# EAGLE board Tractive System Board Rev2 (EAGLE 9.6.2)
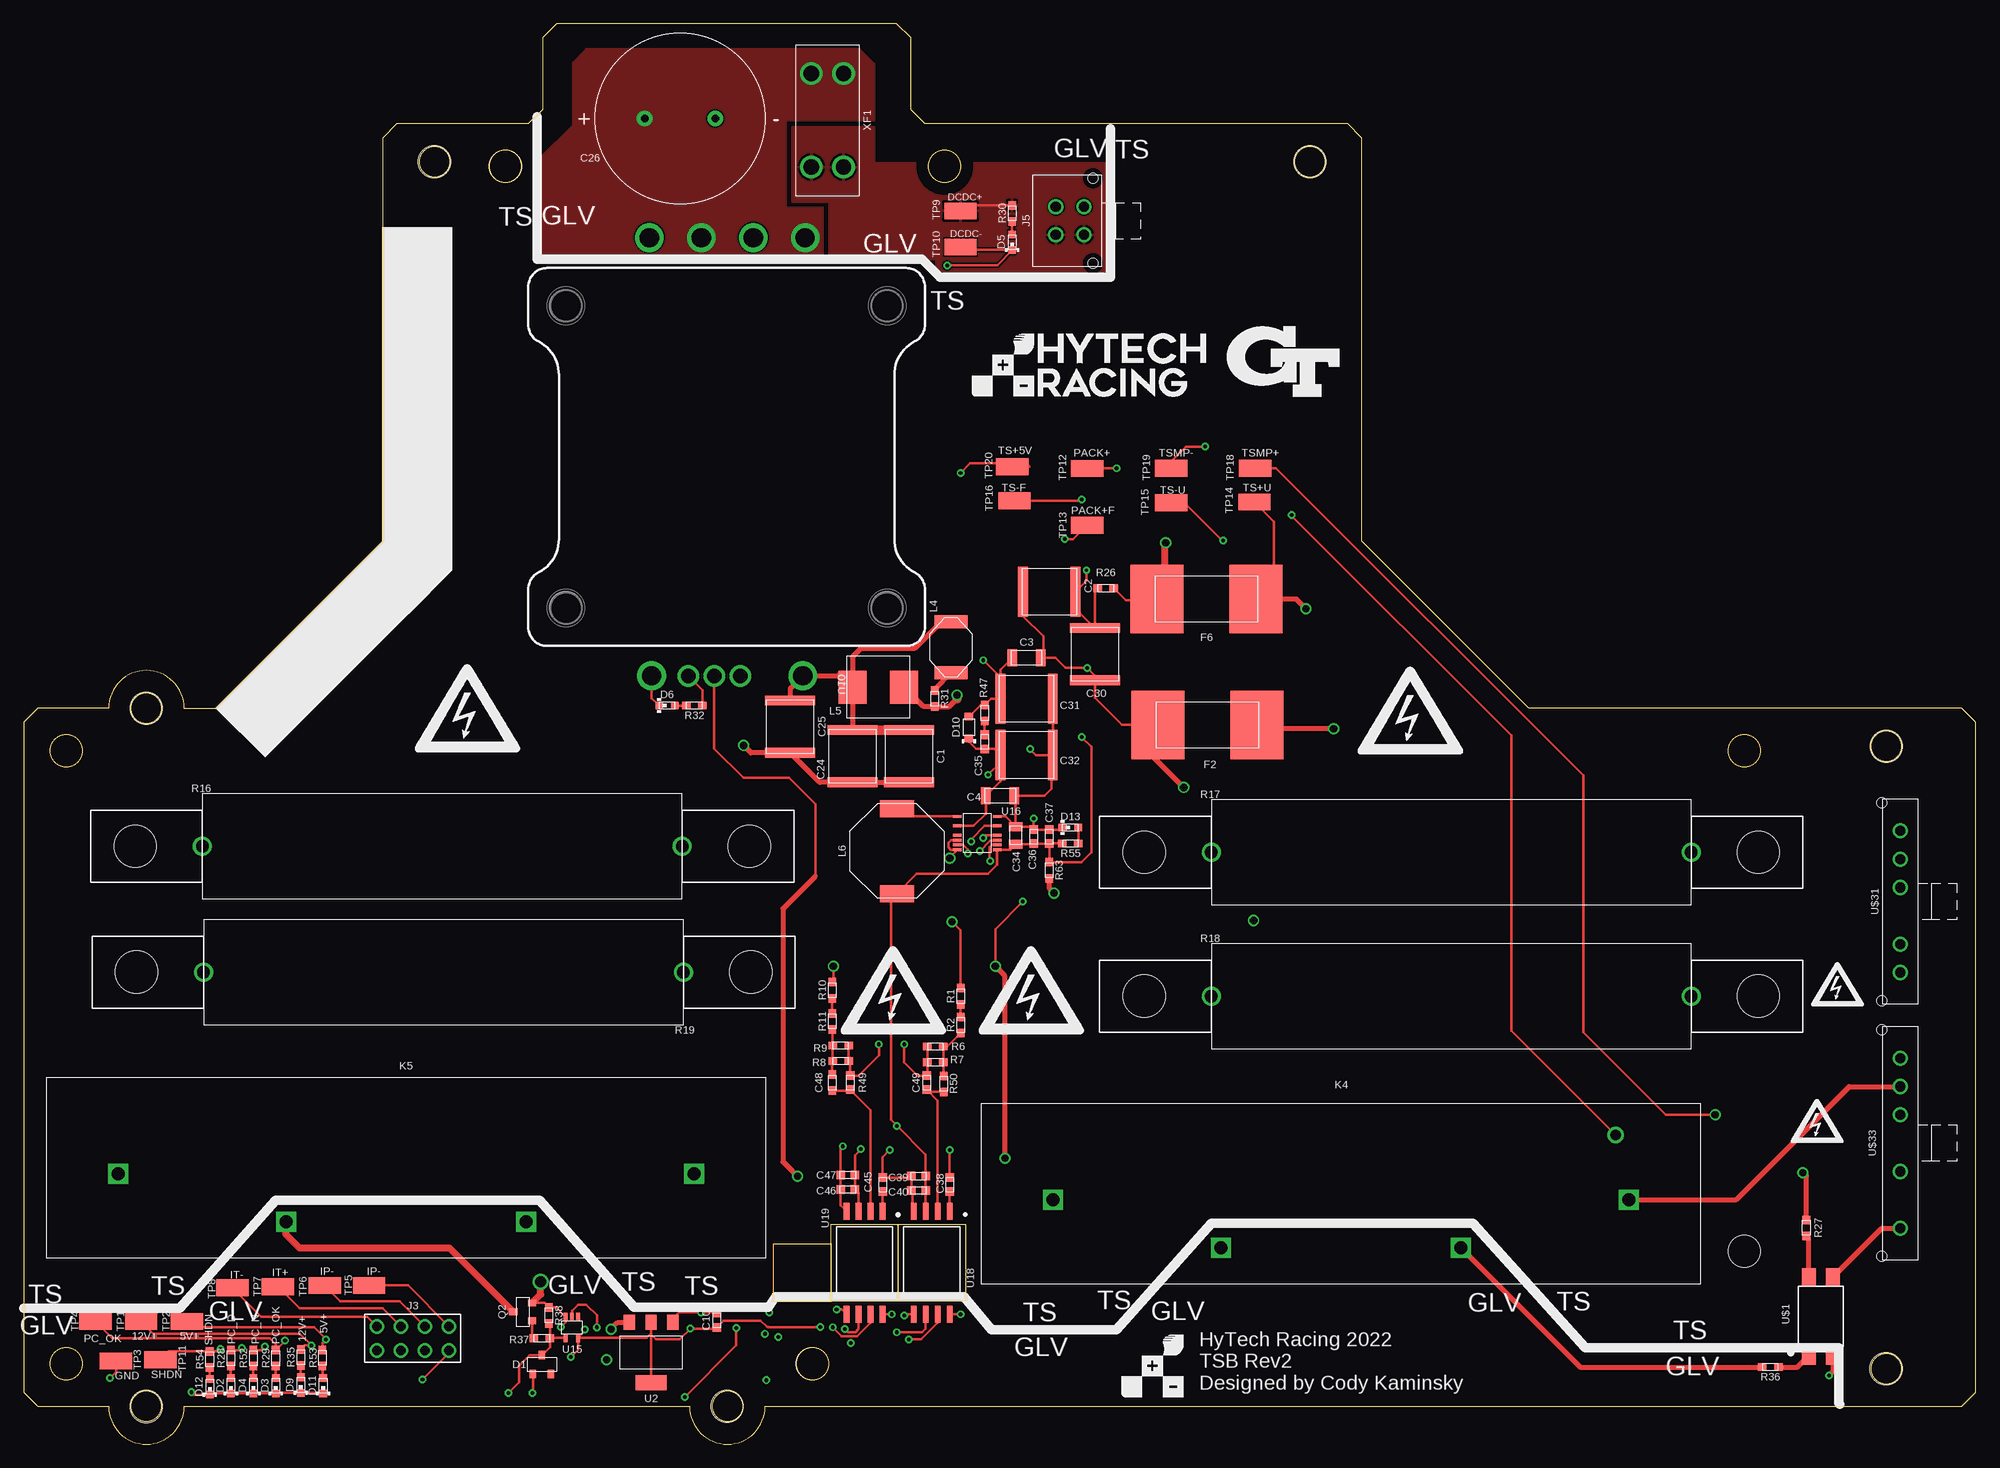
[diagram p0: board, top side]
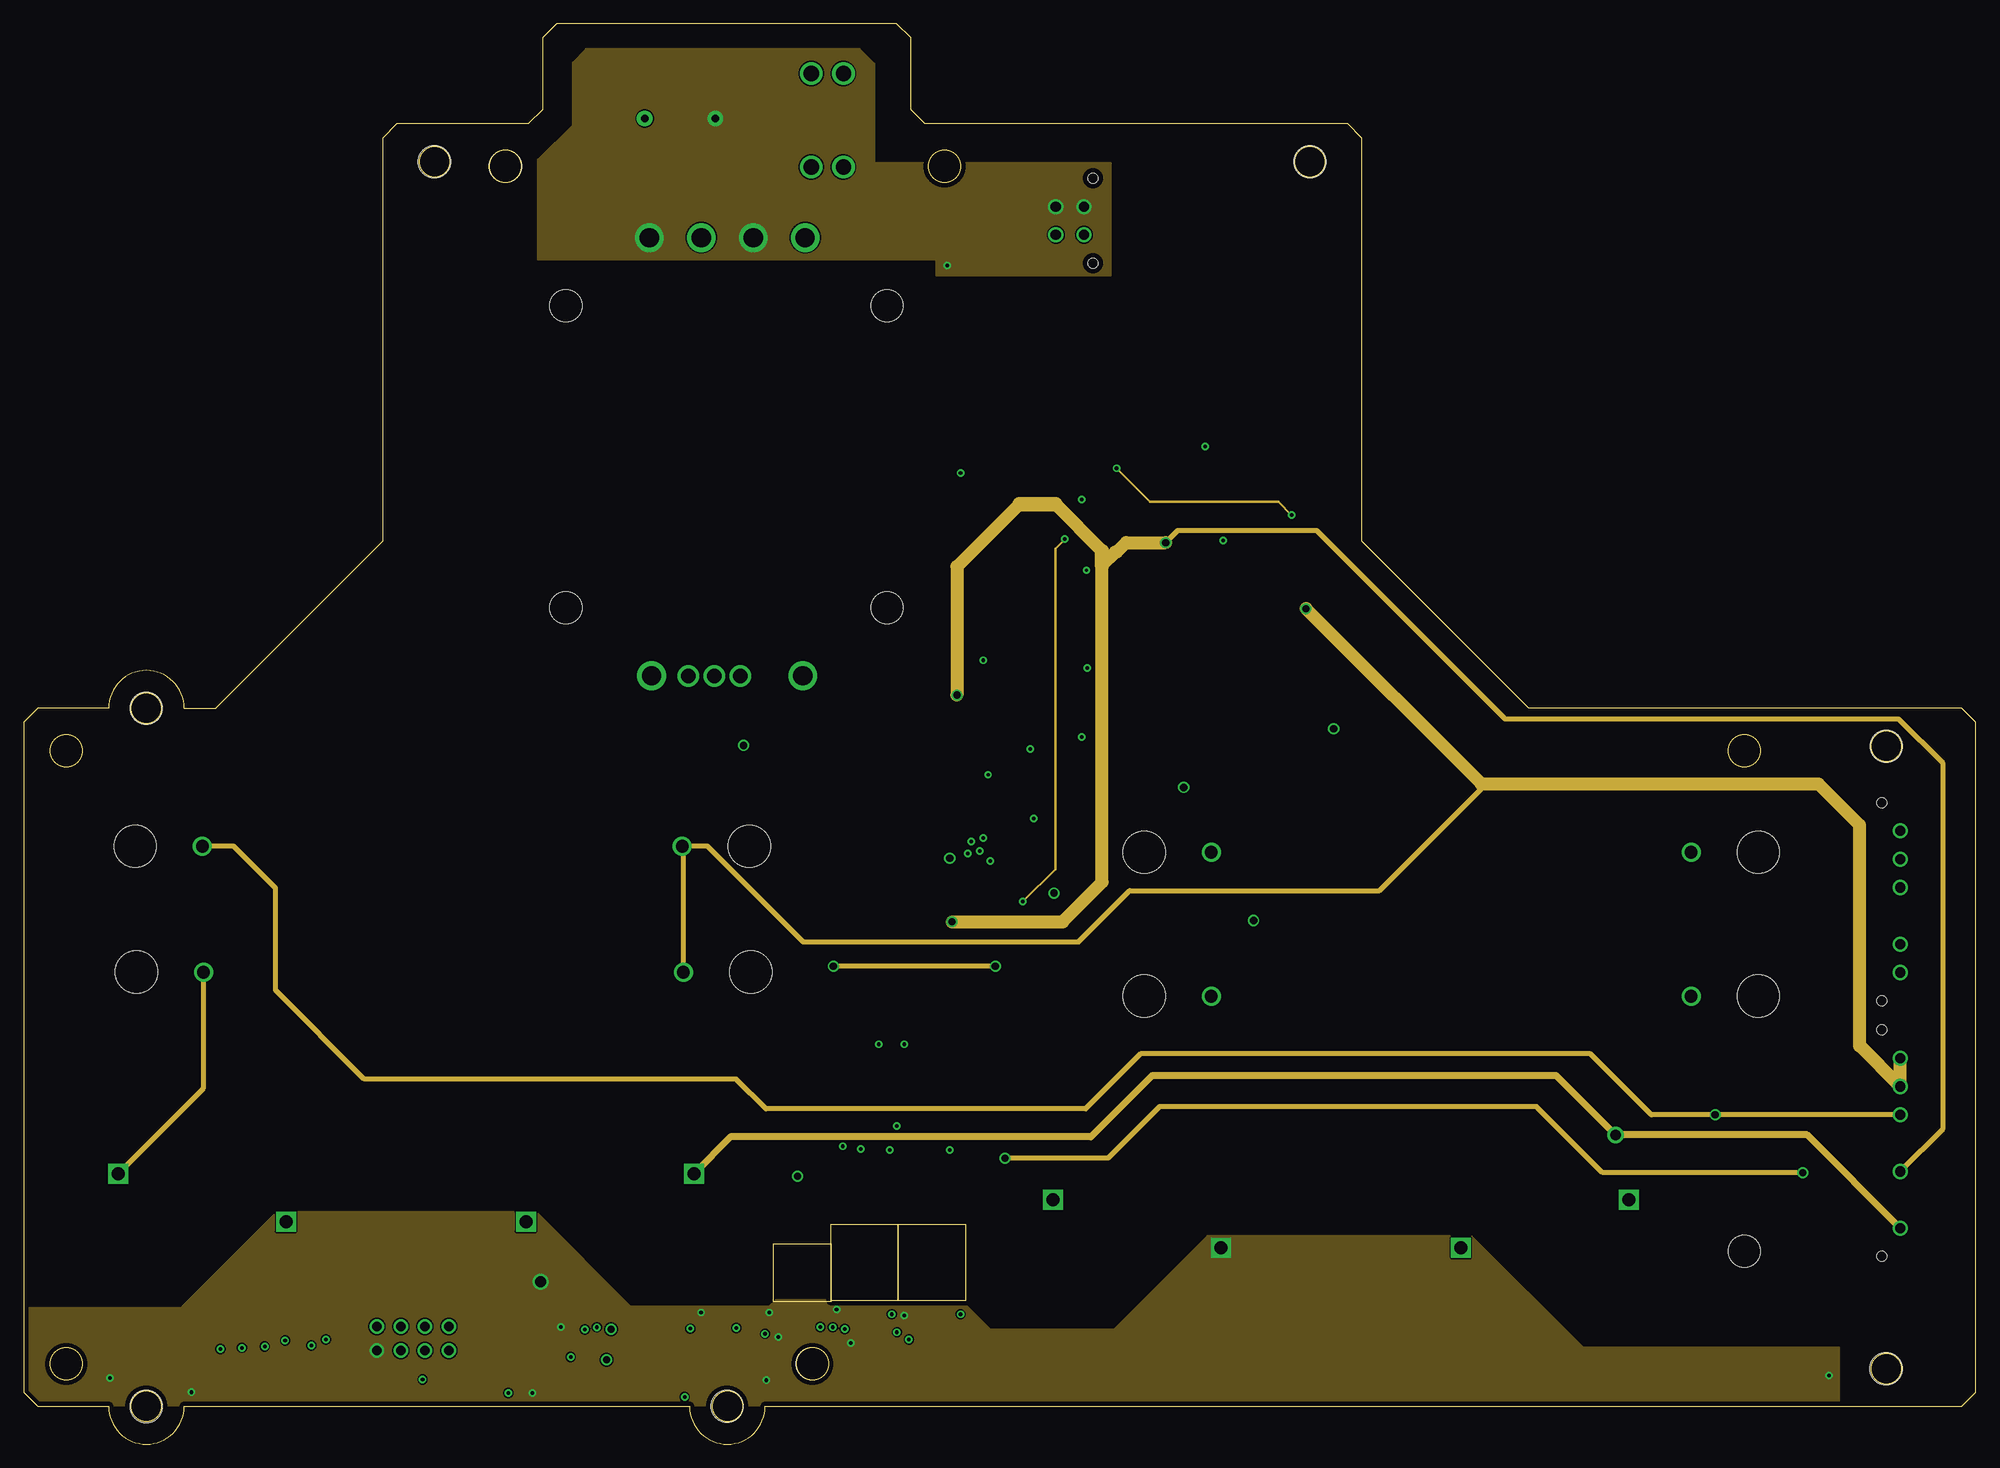
[diagram p1: board, inner layer Route2]
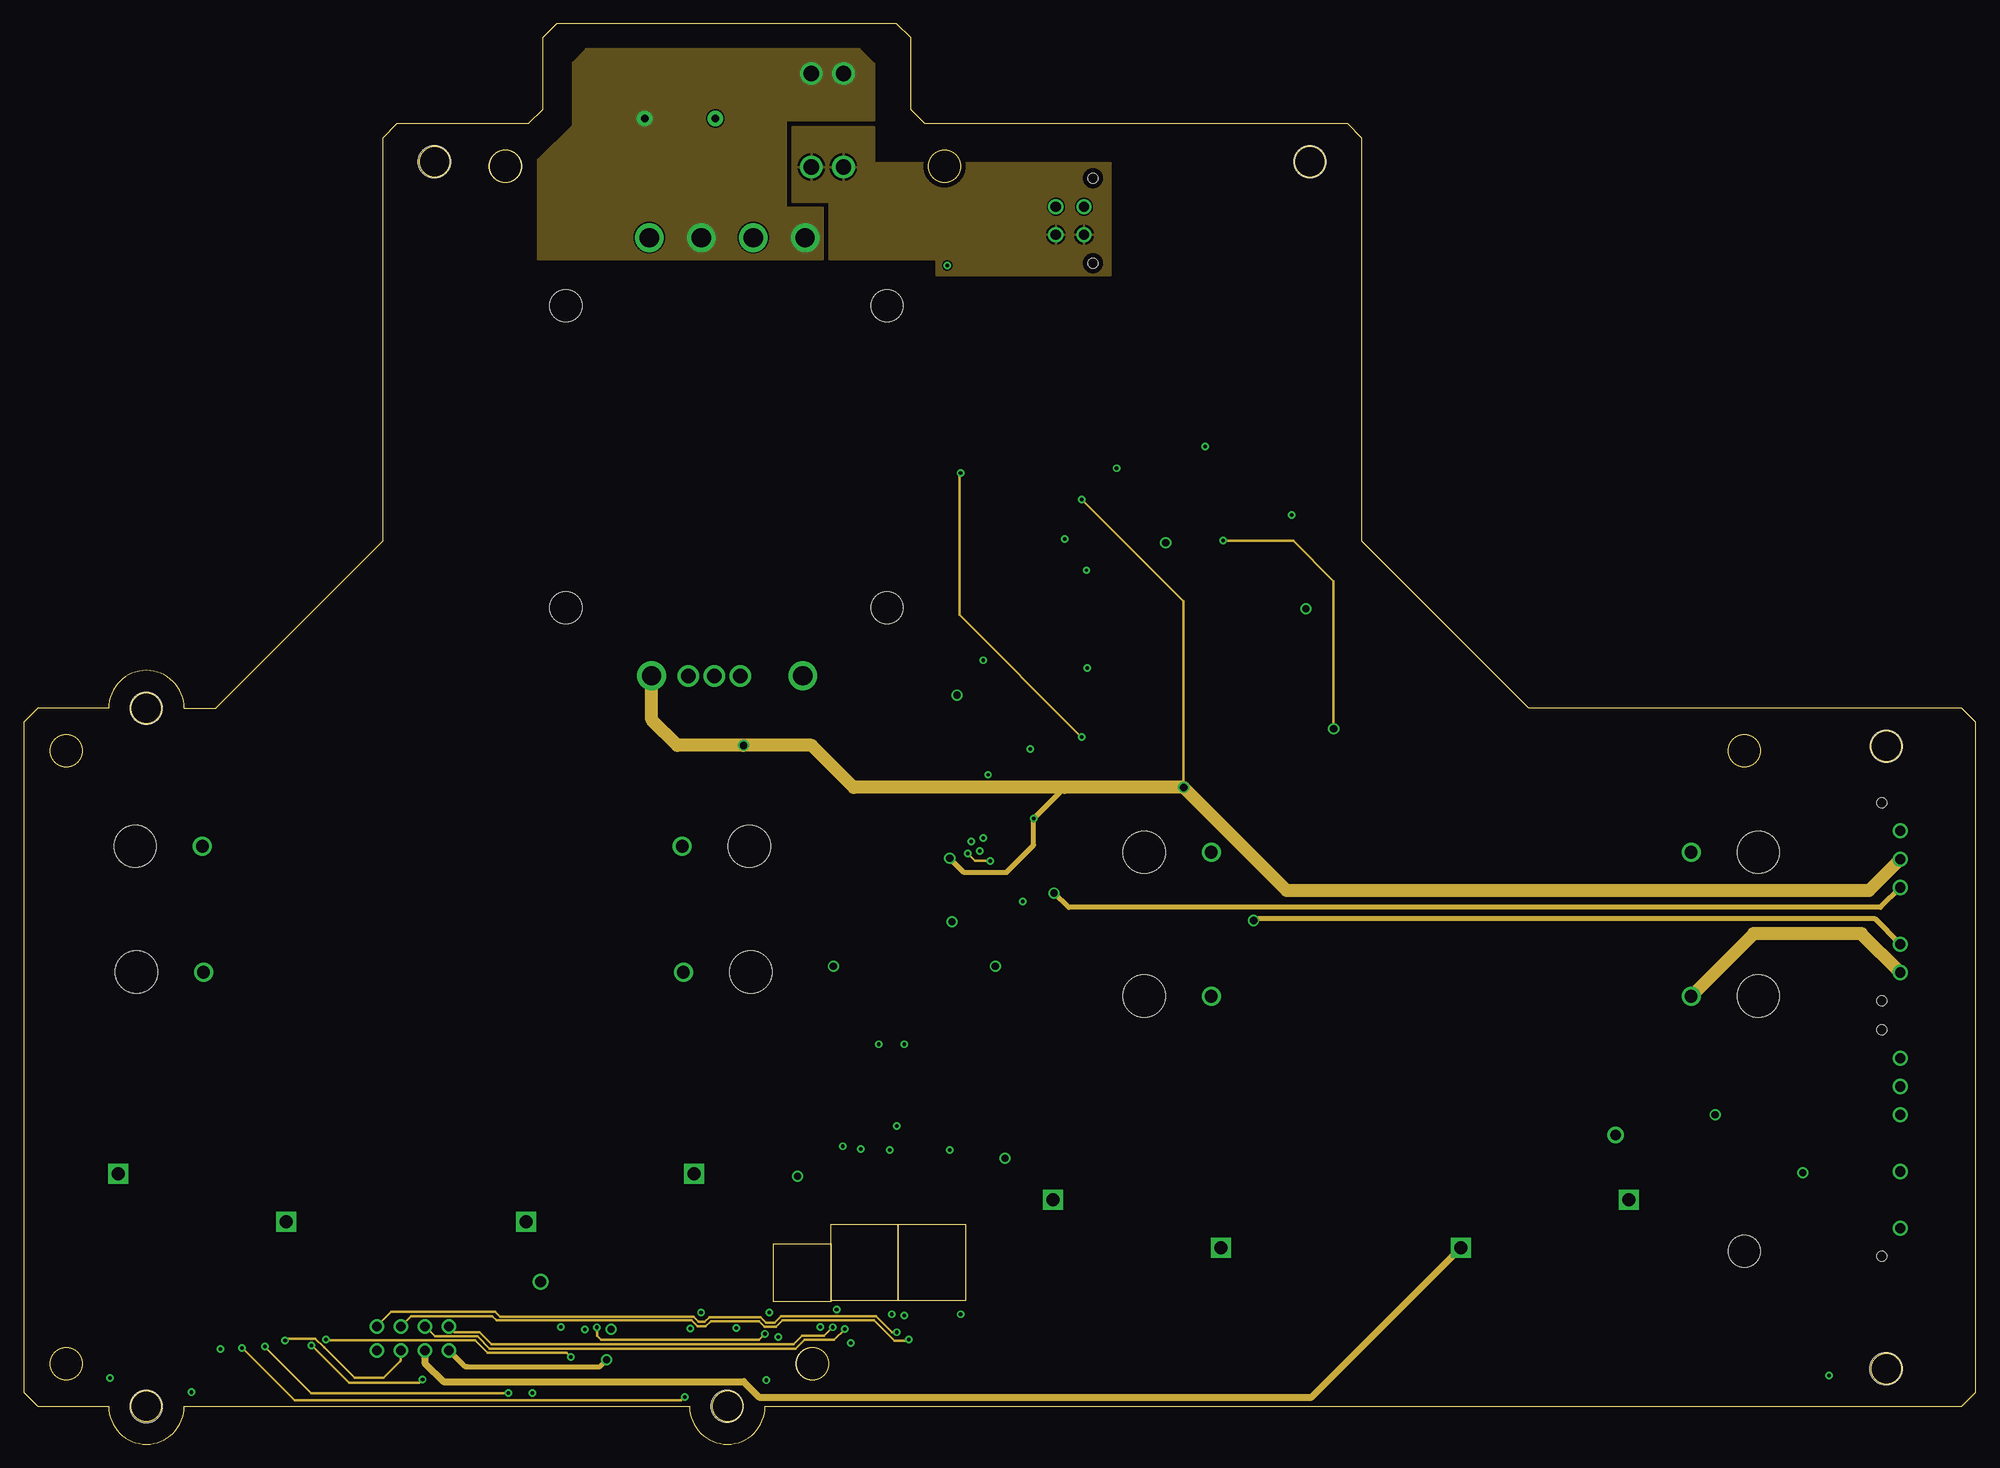
[diagram p2: board, inner layer Route15]
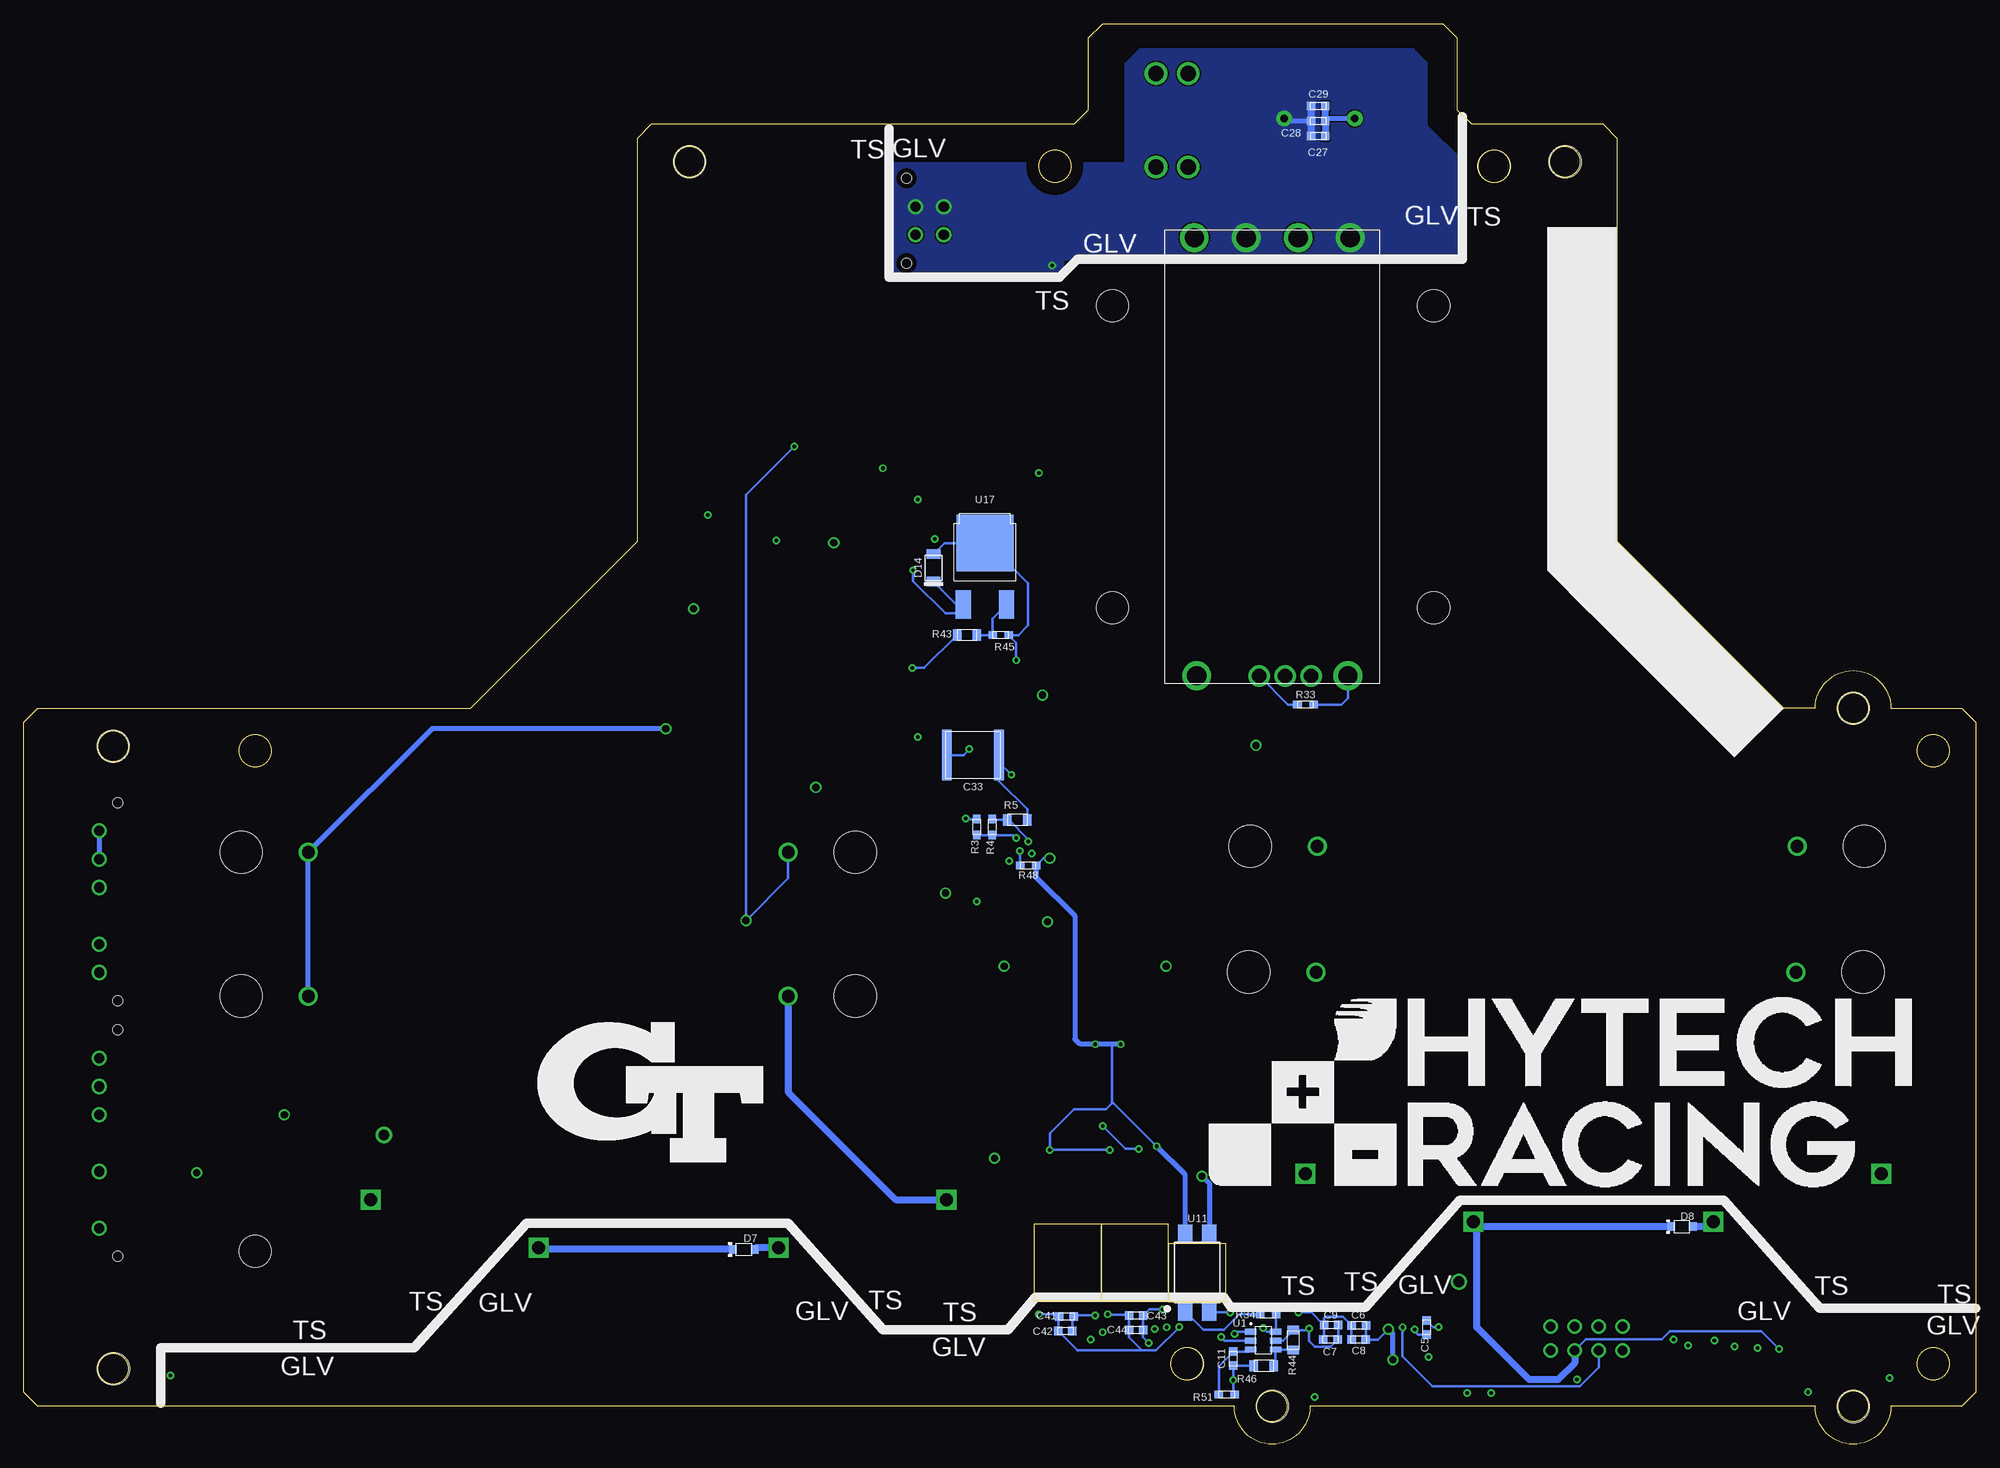
[diagram p3: board, bottom side, seen from below]

Size 206.67 x 150.35 mm. Coordinates in mm from the lower left corner, seen from the top.
Outline: 0,76.39 0,5.5 1.5,4 9,4 arc180 17,4 70.5,4 arc180 78.5,4 205.17,4 206.67,5.5 206.67,76.39 205.17,77.89 159.35,77.89 141.67,95.57 141.67,138.24 140.17,139.74 95.42,139.74 93.92,141.24 93.92,148.85 92.42,150.35 56.42,150.35 54.92,148.85 54.92,141.24 53.42,139.74 39.5,139.74 38,138.24 38,95.57 20.32,77.89 17,77.89 arc180 9,77.89 1.5,77.89 0,76.39
Outline: circle at 4.5,73.39 radius 1.7
Outline: circle at 4.5,8.5 radius 1.7
Outline: circle at 83.5,8.5 radius 1.7
Outline: circle at 182.17,73.39 radius 1.7
Outline: circle at 51,135.24 radius 1.7
Outline: circle at 97.5,135.24 radius 1.7
Outline: circle at 136.17,135.74 radius 1.6
Outline: circle at 197.17,73.89 radius 1.6
Outline: circle at 197.17,8 radius 1.6
Outline: circle at 13,4 radius 1.6
Outline: circle at 13,77.89 radius 1.6
Outline: circle at 43.5,135.74 radius 1.6
Outline: circle at 74.5,4 radius 1.6
Copper layers (1+2*15+16): Top 0.035mm / dielectric 0.2mm / Route2 0.0175mm / dielectric 1.065mm / Route15 0.0175mm / dielectric 0.2mm / Bottom 0.035mm
Design rules "HyTech Default (4 Layer) *": minimum track width 6mil, minimum drill 10mil, track to track 6mil, track to pad 6mil, pad to pad 6mil, via to via 20mil, smd to smd 6mil, copper to edge 20mil, drill to drill 21mil, minimum pad ring 8mil, minimum via ring 8mil, stop-mask expansion 3mil, vias tented up to drill 30mil, thermal gap 10mil

## Footprints (pad centres in the part's own frame; a part is rotated, then mirrored left to right if it is on the bottom)
2220-CAP = smd 1.05 x 5.3: 1 -2.775,0; 2 2.775,0
1206-CAP = smd 1 x 1.8: 1 -1.5,0; 2 1.5,0
0603-CAP = smd 0.9 x 0.9: 1 -0.75,0; 2 0.75,0
EKYC*MM = drill 0.8 pad 1.651: + 3.75,0; - -3.75,0
0805-CAP = smd 0.95 x 1.4: 1 -0.925,0; 2 0.925,0
SOT-23 = smd 0.711 x 0.889: 1 -0.94,-1.003; 2 0.94,-1.003; 3 0,1.003
0603-LED = smd 0.8 x 0.8: 1 -0.825,0; 2 0.825,0
SOD-323 = smd 0.8 x 0.9: A -1.15,0; C 1.15,0
SOD123F = smd 1 x 1.5: A -1.45,0; C 1.45,0
0885 = smd 5.6 x 7.23: 1 -5.25,0; 2 5.25,0
FLEX_STACK_PTH_08_DUAL = drill 1.016: 1 -3.81,1.27; 2 -1.27,1.27; 3 1.27,1.27; 4 3.81,1.27; 5 -3.81,-1.27; 6 -1.27,-1.27; 7 1.27,-1.27; 8 3.81,-1.27
MOLEX_MICROFIT_PTH_VERTICAL_04_DUAL = drill 1.067: 1 1.499,-2.997; 2 -1.499,-2.997; 3 1.499,0; 4 -1.499,0 | hole 1.067: 4.496,0.94; -4.496,0.94
335X = drill 1.397 square: 1 30.48,0; 2 12.7,-5.08; 3 -12.7,-5.08; 4 -30.48,0
74451133 = smd 1.4 x 3.5: 1 -2.7,0; 2 2.7,0
WE-LMHI = smd 2.95 x 3.5: 1 -2.725,0; 2 2.725,0
SRU1048 = smd 1.8 x 3.6: 1 -4.5,0; 2 4.5,0
0603-RES = smd 0.9 x 0.8: 1 -0.85,0; 2 0.85,0
0805-RES = smd 0.9 x 1.2: 1 -1.05,0; 2 1.05,0
B20 = drill 1.35: 1 25.4,0; 2 -25.4,0 | hole 4.5: -32.51,0; 32.51,0
MICRO_MINIATURE = smd 3.429 x 1.778: 1 0,0
SOT-23-6 = smd 0.62 x 1.22: 1 -0.95,-1.31; 2 0,-1.31; 3 0.95,-1.31; 4 -0.95,1.31; 5 0,1.31; 6 0.95,1.31
SOT223 = smd 1.2 x 1.6: 1 -2.3,-3.2; 2 0,-3.2; 3 2.3,-3.2 | smd 3.3 x 1.6: 4 0,3.2
DCM4623 = drill 2.03 pad 2.79: 1 -23.19,8; 5 -23.19,-8; 6 23.19,8.25; 7 23.19,2.75; 8 23.19,-2.75; 9 23.19,-8.25 | drill 1.52 pad 2.02: 2 -23.19,1.38; 3 -23.19,-1.38; 4 -23.19,-4.13
DIP-4_AIRGAP = smd 1.5 x 1.9: 1 -1.27,-4.15; 2 1.27,-4.15; 3 -1.27,4.15; 4 1.27,4.15
SC-70-5 = smd 0.4 x 0.9: 1 -0.65,-1.1; 2 0,-1.1; 3 0.65,-1.1; 4 0.65,1.1; 5 -0.65,1.1
MSE16(12) = smd 0.309 x 0.902: 1 -1.75,-2.102; 3 -0.75,-2.102; 5 0.25,-2.102; 6 0.75,-2.102; 7 1.25,-2.102; 8 1.75,-2.102; 9 1.75,2.102; 10 1.25,2.102; 11 0.75,2.102; 12 0.25,2.102; 14 -0.75,2.102; 16 -1.75,2.102
DPAK(2-7K1S) = smd 1.6 x 3: 1 -2.3,-3.5; 3 2.3,-3.5 | smd 6 x 6: 2 0,3
SOIC-08(WIDE,0.295")-AIRGAP = smd 0.6 x 1.8: 1 -1.905,-5.45; 2 -0.635,-5.45; 3 0.635,-5.45; 4 1.905,-5.45; 5 1.905,5.45; 6 0.635,5.45; 7 -0.635,5.45; 8 -1.905,5.45
DIP-4 = smd 1.5 x 1.9: 1 -1.27,-4.15; 2 1.27,-4.15; 3 -1.27,4.15; 4 1.27,4.15
MOUNTING_M3 = hole 3.4: 0,0
MOLEX_MICROFIT_PTH_VERTICAL_06_SINGLE_SPACED = drill 1.067: 1 -7.493,0; 2 -4.496,0; 3 -1.499,0; 4 4.496,0; 5 7.493,0 | hole 1.067: 10.49,-1.96; -10.49,-1.96
MOLEX_MICROFIT_PTH_VERTICAL_07_SINGLE_SPACED = drill 1.067: 1 -8.992,0; 2 -5.994,0; 3 -2.997,0; 4 2.997,0; 5 8.992,0 | hole 1.067: 11.989,-1.956; -11.989,-1.956
3568 = drill 1.6: 1 -4.953,1.702; 2 -4.953,-1.702; 3 4.953,-1.702; 4 4.953,1.702

## Placement (x,y rotation side)
C1  CAPACITOR_2220_630V_0.1UF  [2220-CAP]  93.73,72.81 270 top
C2  CAPACITOR_2220_630V_0.1UF  [2220-CAP]  108.58,90.21 180 top
C3  CAPACITOR_1206_250V_0.1UF  [1206-CAP]  106.17,83.23 0 top
C4  CAPACITOR_1206_250V_0.1UF  [1206-CAP]  103.38,68.62 0 top
C5  CAPACITOR_0603_10V_0.1UF  [0603-CAP]  58.17,12.36 90 bottom
C6  CAPACITOR_0603_25V_1UF  [0603-CAP]  65.32,12.59 180 bottom
C7  CAPACITOR_0603_10V_4.7UF  [0603-CAP]  68.33,11.09 180 bottom
C8  CAPACITOR_0603_25V_0.1UF  [0603-CAP]  65.34,11.06 180 bottom
C9  CAPACITOR_0603_10V_0.1UF  [0603-CAP]  68.26,12.6 180 bottom
C10  CAPACITOR_0603_10V_0.1UF  [0603-CAP]  73.41,13.12 90 top
C11  CAPACITOR_0603_10V_0.1UF  [0603-CAP]  78.61,9.06 270 bottom
C24  CAPACITOR_2220_630V_1UF  [2220-CAP]  87.76,72.81 270 top
C25  CAPACITOR_2220_630V_1UF  [2220-CAP]  81.15,75.93 270 top
C26  CAPACITOR_POLAR__3600UF  [EKYC*MM]  69.49,140.3 180 top
C27  CAPACITOR_0603_25V_10UF  [0603-CAP]  69.62,138.47 0 bottom
C28  CAPACITOR_0603_25V_1UF  [0603-CAP]  69.62,140.02 0 bottom
C29  CAPACITOR_0603_35V_0.1UF  [0603-CAP]  69.62,141.61 0 bottom
C30  CAPACITOR_2220_630V_1UF  [2220-CAP]  113.41,83.61 270 top
C31  CAPACITOR_2220_250V_1UF  [2220-CAP]  106.17,78.91 0 top
C32  CAPACITOR_2220_250V_1UF  [2220-CAP]  106.17,72.94 0 top
C33  CAPACITOR_2220_250V_1UF  [2220-CAP]  106.17,72.94 180 bottom
C34  CAPACITOR_0805_25V_22UF  [0805-CAP]  105.03,64.43 90 top
C35  CAPACITOR_0603_10V_10NF  [0603-CAP]  101.73,74.34 90 top
C36  CAPACITOR_0603_25V_1UF  [0603-CAP]  106.93,64.3 90 top
C37  CAPACITOR_0603_25V_0.1UF  [0603-CAP]  108.58,64.3 90 top
C38  CAPACITOR_0603_10V_1UF  [0603-CAP]  98.04,27.47 90 top
C39  CAPACITOR_0603_10V_1UF  [0603-CAP]  94.74,26.84 180 top
C40  CAPACITOR_0603_10V_1UF  [0603-CAP]  94.74,28.36 180 top
C41  CAPACITOR_0603_10V_1UF  [0603-CAP]  96.27,13.5 0 bottom
C42  CAPACITOR_0603_10V_0.1UF  [0603-CAP]  96.39,11.98 0 bottom
C43  CAPACITOR_0603_10V_0.1UF  [0603-CAP]  88.9,13.63 0 bottom
C44  CAPACITOR_0603_10V_1UF  [0603-CAP]  88.9,12.11 0 bottom
C45  CAPACITOR_0603_10V_1UF  [0603-CAP]  90.93,27.47 90 top
C46  CAPACITOR_0603_10V_1UF  [0603-CAP]  87.25,26.97 180 top
C47  CAPACITOR_0603_10V_1UF  [0603-CAP]  87.25,28.49 180 top
C48  CAPACITOR_0603_10V_10NF  [0603-CAP]  87.5,38.27 90 top
C49  CAPACITOR_0603_10V_10NF  [0603-CAP]  95.63,38.27 90 top
D1  TVS_8V  [SOT-23]  54.86,8.42 0 top
D2  LED_0603_WHITE  [0603-LED]  21.96,6.2 90 top
D3  LED_0603_GREEN  [0603-LED]  26.7,6.2 90 top
D4  LED_0603_YELLOW  [0603-LED]  24.33,6.2 90 top
D5  LED_0603_BLUE  [0603-LED]  104.65,127.22 90 top
D6  LED_0603_RED  [0603-LED]  68.1,78.19 0 top
D7  SCHOTTKY_SOD323_30V  [SOD-323]  130.43,20.62 180 bottom
D8  SCHOTTKY_SOD323_30V  [SOD-323]  31.11,23.03 180 bottom
D9  LED_0603_BLUE  [0603-LED]  29.34,6.26 90 top
D10  SCHOTTKY_SOD323_30V  [SOD-323]  100.08,75.86 270 top
D11  LED_0603_BLUE  [0603-LED]  31.71,6.2 90 top
D12  LED_0603_ORANGE  [0603-LED]  19.71,6.07 90 top
D13  LED_0603_BLUE  [0603-LED]  110.8,65.26 0 top
D14  RECTIFIER_400V_SOD123  [SOD123F]  110.36,92.75 270 bottom
F2  FUSE_0885_1.25  [0885]  125.33,76.12 180 top
F6  FUSE_0885_1.25  [0885]  125.22,89.45 180 top
J3  CONNECTOR-8_S_S  [FLEX_STACK_PTH_08_DUAL]  41.2,11.2 180 top
J5  CONNECTOR-4__  [MOLEX_MICROFIT_PTH_VERTICAL_04_DUAL]  112.26,129.48 270 top
K4  RELAY_SPST_NC_POLARIZED_3550_12  [335X]  139.45,25.88 0 top
K5  RELAY_SPST_NO_3550_12  [335X]  40.48,28.64 0 top
L4  INDUCTOR_74451133_3.6UH  [74451133]  98.2,84.36 270 top
L5  INDUCTOR_WELMHI_56UH  [WE-LMHI]  90.47,80.13 0 top
L6  INDUCTOR_SRU1048_330UH  [SRU1048]  92.46,62.78 270 top
Q2  TRANSISTOR_N_MOS__PMV15ENEA  [SOT-23]  52.83,14.01 90 top
R1  RESISTOR_0603_360K  [0603-RES]  99.19,47.41 90 top
R2  RESISTOR_0603_510K  [0603-RES]  99.19,44.36 90 top
R3  RESISTOR_0603_8.66K  [0603-RES]  105.79,65.32 270 bottom
R4  RESISTOR_0603_13K  [0603-RES]  104.14,65.32 90 bottom
R5  RESISTOR_0805_976K  [0805-RES]  101.47,66.08 0 bottom
R6  RESISTOR_0603_33K  [0603-RES]  96.52,42.08 0 top
R7  RESISTOR_0603_33K  [0603-RES]  96.52,40.43 0 top
R8  RESISTOR_0603_33K  [0603-RES]  86.49,40.55 180 top
R9  RESISTOR_0603_33K  [0603-RES]  86.49,42.21 180 top
R10  RESISTOR_0603_360K  [0603-RES]  85.6,48.05 90 top
R11  RESISTOR_0603_510K  [0603-RES]  85.6,44.75 90 top
R16  RESISTOR_B20_10K  [B20]  44.32,63.29 0 top
R17  RESISTOR_B20_10K  [B20]  151.13,62.65 0 top
R18  RESISTOR_B20_10K  [B20]  151.13,47.41 0 top
R19  RESISTOR_B20_750  [B20]  44.45,49.95 180 top
R26  RESISTOR_0603_3.3  [0603-RES]  114.55,90.59 180 top
R27  RESISTOR_0603_3.3  [0603-RES]  188.72,22.9 270 top
R28  RESISTOR_0603_1K  [0603-RES]  21.94,9.12 90 top
R29  RESISTOR_0603_1K  [0603-RES]  26.68,9.11 90 top
R30  RESISTOR_0603_1K  [0603-RES]  104.65,130.27 90 top
R31  RESISTOR_0603_1.62  [0603-RES]  96.46,78.91 270 top
R32  RESISTOR_0603_1K  [0603-RES]  71.01,78.17 180 top
R33  RESISTOR_0603_DNP  [0603-RES]  70.97,78.29 0 bottom
R34  RESISTOR_0603_1K  [0603-RES]  74.93,13.76 180 bottom
R35  RESISTOR_0603_1K  [0603-RES]  29.34,9.19 90 top
R36  RESISTOR_0603_1K  [0603-RES]  184.91,8.17 180 top
R37  RESISTOR_0603_10  [0603-RES]  54.86,11.22 180 top
R38  RESISTOR_0603_10K  [0603-RES]  55.63,13.63 270 top
R43  RESISTOR_0805_HV365K  [0805-RES]  106.81,85.64 0 bottom
R44  RESISTOR_0805_1M  [0805-RES]  72.26,11.02 90 bottom
R45  RESISTOR_0603_3.32K  [0603-RES]  103.25,85.64 0 bottom
R46  RESISTOR_0805_523K  [0805-RES]  75.38,8.31 0 bottom
R47  RESISTOR_0603_10K  [0603-RES]  101.73,77.38 270 top
R48  RESISTOR_0603_75K  [0603-RES]  100.33,61.26 180 bottom
R49  RESISTOR_0603_33.2K  [0603-RES]  85.6,38.27 270 top
R50  RESISTOR_0603_33.2K  [0603-RES]  97.41,38.14 270 top
R51  RESISTOR_0603_154K  [0603-RES]  79.31,5.26 180 bottom
R52  RESISTOR_0603_1K  [0603-RES]  24.31,9.11 90 top
R53  RESISTOR_0603_1K  [0603-RES]  31.64,9.13 270 top
R54  RESISTOR_0603_1K  [0603-RES]  19.7,8.98 90 top
R55  RESISTOR_0603_1K  [0603-RES]  110.81,63.58 180 top
R63  RESISTOR_0603_1K  [0603-RES]  108.58,60.75 270 top
TP1  TEST_POINT  [MICRO_MINIATURE]  12.45,13 0 top
TP2  TEST_POINT  [MICRO_MINIATURE]  17.27,13 0 top
TP3  TEST_POINT  [MICRO_MINIATURE]  9.78,8.8 0 top
TP4  TEST_POINT  [MICRO_MINIATURE]  7.62,13 0 top
TP5  TEST_POINT  [MICRO_MINIATURE]  36.58,16.81 0 top
TP6  TEST_POINT  [MICRO_MINIATURE]  31.88,16.81 0 top
TP7  TEST_POINT  [MICRO_MINIATURE]  26.92,16.68 0 top
TP8  TEST_POINT  [MICRO_MINIATURE]  22.1,16.55 0 top
TP9  TEST_POINT  [MICRO_MINIATURE]  99.19,130.52 0 top
TP10  TEST_POINT  [MICRO_MINIATURE]  99.19,126.71 0 top
TP11  TEST_POINT  [MICRO_MINIATURE]  14.48,8.93 0 top
TP12  TEST_POINT  [MICRO_MINIATURE]  112.58,103.26 0 top
TP13  TEST_POINT  [MICRO_MINIATURE]  112.58,97.27 0 top
TP14  TEST_POINT  [MICRO_MINIATURE]  130.3,99.73 0 top
TP15  TEST_POINT  [MICRO_MINIATURE]  121.47,99.63 0 top
TP16  TEST_POINT  [MICRO_MINIATURE]  104.9,99.86 0 top
TP18  TEST_POINT  [MICRO_MINIATURE]  130.36,103.31 0 top
TP19  TEST_POINT  [MICRO_MINIATURE]  121.47,103.28 0 top
TP20  TEST_POINT  [MICRO_MINIATURE]  104.65,103.46 0 top
U1  LTC6994_1  [SOT-23-6]  75.45,10.97 270 bottom
U2  VOLTAGE_REGULATOR_SOT223_5V  [SOT223]  66.42,9.69 180 top
U10  DCM4623TD2J13D0T70  [DCM4623]  74.49,104.51 90 bottom
U11  RELAY_SOLIDSTATE_NC_AG  [DIP-4_AIRGAP]  82.43,18.15 0 bottom
U15  LOGICGATE_INVERTER_DCKR  [SC-70-5]  58.04,12.36 180 top
U16  LTC3639  [MSE16(12)]  100.96,64.68 270 top
U17  VOLTAGE_REGULATOR_ADJ_LR8_DPAK  [DPAK(2-7K1S)]  104.9,92.37 0 bottom
U18  ISO224B_AIRGAP  [SOIC-08(WIDE,0.295")-AIRGAP]  96.14,19.23 180 top
U19  ISO224B_AIRGAP  [SOIC-08(WIDE,0.295")-AIRGAP]  89.03,19.22 180 top
U$1  RELAY_SOLIDSTATE_NO  [DIP-4]  190.25,13.5 0 top
U$5  [MOUNTING_M3]  12.98,3.99 0 top
U$6  [MOUNTING_M3]  12.99,77.91 0 top
U$7  [MOUNTING_M3]  74.48,4 0 top
U$8  [MOUNTING_M3]  197.16,7.98 0 top
U$9  [MOUNTING_M3]  197.17,73.88 0 top
U$10  [MOUNTING_M3]  43.49,135.74 0 top
U$11  [MOUNTING_M3]  136.15,135.74 0 top
U$12  [MOUNTING_M3]  57.4,120.49 0 top
U$13  [MOUNTING_M3]  91.42,120.49 0 top
U$14  [MOUNTING_M3]  57.4,88.53 0 top
U$15  [MOUNTING_M3]  91.42,88.53 0 top
U$26  [MOUNTING_M3]  182.17,20.41 0 top
U$31  CONNECTOR-5_MICRO_V6S_  [MOLEX_MICROFIT_PTH_VERTICAL_06_SINGLE_SPACED]  198.67,57.42 270 top
U$33  CONNECTOR-5_MICRO_V7S_  [MOLEX_MICROFIT_PTH_VERTICAL_07_SINGLE_SPACED]  198.66,31.86 270 top
U$34  [MOUNTING_M3]  4.5,8.5 0 top
U$35  [MOUNTING_M3]  83.49,8.5 0 top
U$37  [MOUNTING_M3]  4.5,73.4 0 top
U$38  [MOUNTING_M3]  182.17,73.4 0 top
U$39  [MOUNTING_M3]  97.5,135.24 0 top
U$41  [MOUNTING_M3]  51,135.24 0 top
U$43  [LOGO_HYTECH_MEDIUM]  100.33,110.91 0 top
U$44  [HV_0.50"]  192.02,48.68 0 top
U$45  [HV_0.50"]  189.86,34.2 0 top
U$46  [HV_LARGE]  46.99,77.89 0 top
U$47  [HV_LARGE]  106.68,48.05 0 top
U$48  [HV_1.00"]  92.07,48.05 0 top
U$52  [HV_1.00"]  146.81,77.64 0 top
U$53  [TS]  52.07,129.96 0 top
U$54  [LOGO_GT_0.50"]  133.35,114.6 0 top
U$55  [LOGO_HYTECH_SQUARE_0.28"]  119.51,8.3 0 top
U$56  [GLV]  107.7,10.33 0 top
U$57  [GLV]  122.17,14.14 0 top
U$58  [GLV]  155.7,15.03 0 top
U$59  [GLV]  176.66,8.3 0 top
U$60  [GLV]  58.34,16.91 0 top
U$61  [GLV]  22.43,14.14 0 top
U$62  [GLV]  2.41,12.61 0 top
U$63  [TS]  2.29,15.92 0 top
U$64  [TS]  15.29,16.81 0 top
U$65  [TS]  65.1,17.24 0 top
U$66  [TS]  107.57,14.01 0 top
U$67  [TS]  71.75,16.81 0 top
U$68  [TS]  115.44,15.28 0 top
U$69  [TS]  164.08,15.15 0 top
U$70  [TS]  97.79,121.07 0 top
U$71  [TS]  117.35,137.07 0 top
U$72  [GLV]  57.66,130.09 0 top
U$73  [GLV]  91.69,127.12 0 top
U$74  [GLV]  111.89,137.2 0 top
U$75  [TS]  176.4,12.11 0 top
U$76  [LOGO_GT_LARGE]  140.33,37.25 0 bottom
U$77  [LOGO_HYTECH_EXTRA_LARGE]  81.28,27.09 0 bottom
XF1  FUSE_HOLDER_MINIBLADEPTH  [3568]  85.09,140.12 270 top

## Library data of the parts
C1 C2 = HyTechDevices; CAPACITANCE: 0.1uF; DKPN: 445-11980-2-ND; MANUFACTURER: TDK Coporation; MOPN: 810-C5750CH2J104K2KC; MPN: C5750CH2J104K280KC; TOLERANCE: 10%; VOLTAGE: 630V
C3 C4 = HyTechDevices; CAPACITANCE: 0.1uF; DKPN: 445-6079-2-ND; MANUFACTURER: TDK Corporation; MOPN: 810-C3216X7R2E104KT5; MPN: C3216X7R2E104K160AM; TOLERANCE: 10%; VOLTAGE: 250V
C5 C9-C11 C42 C43 = HyTechDevices; CAPACITANCE: 0.1µF; DKPN: 720-1688-1-ND; MANUFACTURER: Vishay Vitramon; MOPN: 77-VJ0603Y104JXQPBC; MPN: VJ0603Y104JXQPW1BC; TOLERANCE: 5%; VOLTAGE: 10V
C6 C28 C36 = HyTechDevices; CAPACITANCE: 1µF; DKPN: 1276-1184-1-ND; MANUFACTURER: Samsung Electro-Mechanics; MOPN: 187-CL10B105KA8NNNC; MPN: CL10B105KA8NNNC; TOLERANCE: 10%; VOLTAGE: 25V
C7 = HyTechDevices; CAPACITANCE: 4.7µF; DKPN: 1276-1044-1-ND; MANUFACTURER: Samsung Electro-Mechanics; MOPN: 187-CL10A475KP8NNNC; MPN: CL10A475KP8NNNC; TOLERANCE: 10%; VOLTAGE: 10V
C8 C37 = HyTechDevices; CAPACITANCE: 0.1µF; DKPN: 1276-1006-1-ND; MANUFACTURER: Samsung Electro-Mechanics; MOPN: 187-CL10B104KA8NNNC; MPN: CL10B104KA8NNNC; TOLERANCE: 10%; VOLTAGE: 25V
C24 C25 C30 = HyTechDevices; CAPACITANCE: 1µF; DKPN: 1608-2220Y6300105KXTWS2CT-ND; MANUFACTURER: Knowles Syfer; MOPN: 843-2220Y63105KXTWS2; MPN: 2220Y6300105KXTWS2; TOLERANCE: 10%; VOLTAGE: 630V
C26 = HyTechDevices; CAPACITANCE: 3600uF; DKPN: 565-EKYC250ELL362ML20S-ND; MANUFACTURER: United Chemi-con; MOPN: 661-YC250ELL362ML20S; MPN: EKYC250ELL362ML20S; VOLTAGE: 25V
C27 = HyTechDevices; CAPACITANCE: 10µF; DKPN: 490-7202-1-ND; MANUFACTURER: Murata Electronics; MOPN: 81-GRM188R61E106MA3D; MPN: GRM188R61E106MA73D; TOLERANCE: 20%; VOLTAGE: 25V
C29 = HyTechDevices; CAPACITANCE: 0.1µF; DKPN: 587-3354-1-ND; MANUFACTURER: Taiyo Yuden; MOPN: 963-GMK107B7104KAHT; MPN: GMK107B7104KAHT; TOLERANCE: 10%; VOLTAGE: 35V
C31-C33 = HyTechDevices; CAPACITANCE: 1µF; DKPN: 445-2304-2-ND; MANUFACTURER: TDK Corporation; MOPN: 810-C5750X7R2E105K; MPN: C5750X7R2E105K230KA; TOLERANCE: 10%; VOLTAGE: 250V
C34 = HyTechDevices; CAPACITANCE: 22µF; DKPN: 311-1903-1-ND; MANUFACTURER: Yageo; MOPN: 603-CC805MKX5R8BB226; MPN: CC0805MKX5R8BB226; TOLERANCE: 20%; VOLTAGE: 25V
C35 C48 C49 = HyTechDevices; CAPACITANCE: 10nF; DKPN: 311-4054-1-ND; MANUFACTURER: Yageo; MOPN: 603-CC603KRX7R6BB103; MPN: CC0603KRX7R6BB103; TOLERANCE: 10%; VOLTAGE: 10V
C38-C41 C44-C47 = HyTechDevices; CAPACITANCE: 1µF; DKPN: 311-1796-1-ND; MANUFACTURER: Yageo; MOPN: 603-CC603KRX7R6BB105; MPN: CC0603KRX7R6BB105; TOLERANCE: 10%; VOLTAGE: 10V
D1 = HyTechDevices; DKPN: GSOT08-E3-08TR-ND; MANUFACTURER: Vishay General Semiconductor - Diodes Division; MOPN: 78-GSOT08-E3-08; MPN: GSOT08-E3-08; VOLTAGE: 8V
D2 = HyTechDevices; COLOR: White; DKPN: SM0603UWC-ND; MANUFACTURER: Bivar Inc.; MOPN: 749-SM0603UWC; MPN: SM0603UWC
D3 = HyTechDevices; COLOR: Green; DKPN: 754-1790-1-ND; MANUFACTURER: Kingbright; MOPN: 604-APT1608ZGCK; MPN: APT1608ZGCK
D4 = HyTechDevices; COLOR: Yellow; DKPN: 754-1788-1-ND; MANUFACTURER: Kingbright; MOPN: 604-APT1608SYCK/J3-PRV; MPN: APT1608SYCK/J3-PRV
D5 D9 D11 D13 = HyTechDevices; COLOR: Blue; DKPN: 754-1789-1-ND; MANUFACTURER: Kingbright; MOPN: 604-APT1608VBC/D; MPN: APT1608VBC/D
D6 = HyTechDevices; COLOR: Red; DKPN: 754-1786-1-ND; MANUFACTURER: Kingbright; MOPN: 604-APT1608SECKJ3PRV; MPN: APT1608SECK/J3-PRV
D7 D8 D10 = HyTechDevices; CURRENT: 0.8A; DKPN: CUS08F30H3FTR-ND; MANUFACTURER: Toshiba Semiconductor and Storage; MOPN: 757-CUS08F30H3F; MPN: CUS08F30; VOLTAGE: 30V
D12 = HyTechDevices; COLOR: Orange; DKPN: 754-1120-1-ND; MANUFACTURER: Kingbright; MOPN: 604-APT1608SECK; MPN: APT1608SECK
D14 = HyTechDevicesTempTSB; CURRENT: 1A; DKPN: US1GWF-7DITR-ND; MANUFACTURER: Diodes Incorporated; MOPN: 621-US1GWF-7; MPN: US1GWF-7; VOLTAGE: 400V
F2 F6 = HyTechDevices; CURRENT: 1.25A; DKPN: F10986CT-ND; MANUFACTURER: Littelfuse Inc.; MOPN: 576-08851.25DR; MPN: 08851.25DR; VOLTAGE: 500V
J3 = HyTechDevices; DKPN: S7107-ND; MANUFACTURER: Sullins Connector Solutions; MPN: PPPC042LFBN-RC
J5 = HyTechDevices; MANUFACTURER: Molex; MPN: 2068320423
K4 = HyTechDevices; DKPN: 1835-1040-ND; MANUFACTURER: Comus International; MPN: 3350-4275-126
K5 = HyTechDevices; DKPN: 1835-1037-ND; MANUFACTURER: Comus International; MPN: 3350-1275-126
L4 = HyTechDevices; CURRENT_RATED: 1.6A; CURRENT_SATURATION: 1A; DCR: 0.13Ω; DKPN: 553-3508-2-ND; INDUCTANCE: 3.6uH; MANUFACTURER: Pulse Electronics Power; MOPN: 673-PA4334362NLT; MPN: PA4334.362NLT; TOLERANCE: 20%
L5 = HyTechDevices; CURRENT_RATED: 1.4A; CURRENT_SATURATION: 2A; DCR: 342mΩ; DKPN: 732-11454-2-ND; INDUCTANCE: 56µH; MANUFACTURER: Wurth Elektronik; MOPN: 710-74437349560; MPN: 74437349560; TOLERANCE: 20%
L6 = HyTechDevices; CURRENT_RATED: 0.65A; CURRENT_SATURATION: 0.52A; DCR: 0.640Ω; DKPN: SRU1048-331YTR-ND; INDUCTANCE: 330µH; MANUFACTURER: Bourns Inc.; MOPN: 652-SRU1048-331Y; MPN: SRU1048-331Y; TOLERANCE: 30%
Q2 = HyTechDevices; DKPN: 1727-8588-1-ND; MANUFACTURER: Nexperia USA Inc.; MOPN: 771-PMV15ENEAR; MPN: PMV15ENEAR
R1 R10 = HyTechDevices; DKPN: RHM360KAYTR-ND; MANUFACTURER: Rohm Semiconductor; MOPN: 755-KTR03EZPF3603; MPN: KTR03EZPF3603; POWER: 0.1W; RESISTANCE: 360k; TOLERANCE: 1%; VOLTAGE_CONTINUOUS: 190V; VOLTAGE_MAX: 350V
R2 R11 = HyTechDevices; DKPN: RHM510KAYTR-ND; MANUFACTURER: Rohm Semiconductor; MOPN: 755-KTR03EZPF5103; MPN: KTR03EZPF5103; POWER: 0.1W; RESISTANCE: 510k; TOLERANCE: 1%; VOLTAGE_CONTINUOUS: 226V; VOLTAGE_MAX: 350V
R3 = HyTechDevices; DKPN: YAG4603TR-ND; MANUFACTURER: Yageo; MOPN: 603-RT0603BRD078K66L; MPN: RT0603BRD078K66L; POWER: 0.1W; RESISTANCE: 8.66k; TOLERANCE: 0.1%; VOLTAGE_CONTINUOUS: 29.43V; VOLTAGE_MAX: 75V
R4 = HyTechDevices; DKPN: P20098TR-ND; MANUFACTURER: Panasonic Electronic Components; MOPN: 667-ERJ-PB3B1302V; MPN: ERJ-PB3B1302V; POWER: 0.1W; RESISTANCE: 13k; TOLERANCE: 0.1%; VOLTAGE_CONTINUOUS: 36V
R5 = HyTechDevices; DKPN: P20935TR-ND; MANUFACTURER: Panasonic Electronic Components; MOPN: 667-ERJ-PB6B9763V; MPN: ERJ-PB6B9763V; POWER: 0.25W; RESISTANCE: 976k; TOLERANCE: 0.1%; VOLTAGE_CONTINUOUS: 150V; VOLTAGE_MAX: 150V
R6-R9 = HyTechDevices; DKPN: RHM33KAYTR-ND; MANUFACTURER: Rohm Semiconductor; MOPN: 755-KTR03EZPF3302; MPN: KTR03EZPF3302; POWER: 0.1W; RESISTANCE: 33k; TOLERANCE: 1%; VOLTAGE_CONTINUOUS: 57.4V; VOLTAGE_MAX: 350V
R16-R18 = HyTechDevices; DKPN: B20J10KE-ND; MANUFACTURER: Ohmite; MOPN: 588-B20J10KE; MPN: B20J10KE; POWER: 20W; RESISTANCE: 10k; TOLERANCE: 5%; VOLTAGE_CONTINUOUS: 447V; VOLTAGE_MAX: 750V
R19 = HyTechDevices; DKPN: B20J750E-ND; MANUFACTURER: Ohmite; MOPN: 588-B20J750E; MPN: B20J750E; POWER: 20W; RESISTANCE: 750; TOLERANCE: 5%; VOLTAGE_CONTINUOUS: 122V; VOLTAGE_MAX: 750V
R26 R27 = HyTechDevices; DKPN: P3.3AJTR-ND; MANUFACTURER: Panasonic Electronic Components; MOPN: 667-ERJ-3RQF3R3V; MPN: ERJ-3RQF3R3V; POWER: 0.1W; RESISTANCE: 3.3; TOLERANCE: 1%; VOLTAGE_CONTINUOUS: 0.57V; VOLTAGE_MAX: 75V
R28-R30 R32 R34-R36 R52-R55 R63 = HyTechDevices; DKPN: 311-1.00KHRCT-ND; MANUFACTURER: Yageo; MOPN: 603-RC0603FR-071KL; MPN: RC0603FR-071KL; POWER: 0.1W; RESISTANCE: 1k; TOLERANCE: 1%; VOLTAGE_CONTINUOUS: 10.00V; VOLTAGE_MAX: 75V
R31 = HyTechDevices; DKPN: 1712-CPF0603B1R62E1TR-ND; MANUFACTURER: TE Conductivity Passive Product; MOPN: 279-CPF0603B1R62E1; MPN: CPF0603B1R62E1; POWER: 0.1W; RESISTANCE: 1.62; TOLERANCE: 0.1%; VOLTAGE_CONTINUOUS: 0.51V; VOLTAGE_MAX: 50V
R33 = HyTechDevices; RESISTANCE: DNP
R37 = HyTechDevices; DKPN: 311-10.0HRCT-ND; MANUFACTURER: Yageo; MOPN: 603-RC0603FR-0710RL; MPN: RC0603FR-0710RL; POWER: 0.1W; RESISTANCE: 10; TOLERANCE: 1%; VOLTAGE_CONTINUOUS: 1V; VOLTAGE_MAX: 75V
R38 R47 = HyTechDevices; DKPN: 311-10.0KHRCT-ND; MANUFACTURER: Yageo; MOPN: 603-RC0603FR-0710KL; MPN: RC0603FR-0710KL; POWER: 0.1W; RESISTANCE: 10k; TOLERANCE: 1%; VOLTAGE_CONTINUOUS: 31.62V; VOLTAGE_MAX: 75V
R43 = HyTechDevices; DKPN: RHM365KAHTR-ND; MANUFACTURER: Rohm; MOPN: 755-KTR10EZPF3653; MPN: KTR10EZPF3653; POWER: 0.125W; RESISTANCE: 365k; TOLERANCE: 1%; VOLTAGE_CONTINUOUS: 213V; VOLTAGE_MAX: 350V
R44 = HyTechDevices; DKPN: P20936TR-ND; MANUFACTURER: Panasonic Electronic Components; MOPN: 667-ERJ-PB6B1004V; MPN: ERJ-PB6B1004V; POWER: 0.25W; RESISTANCE: 1M; TOLERANCE: 0.1%; VOLTAGE_CONTINUOUS: 150V; VOLTAGE_MAX: 150V
R45 = HyTechDevices; DKPN: YAG1651TR-ND; MANUFACTURER: Yageo; MOPN: 603-RT0603BRD073K32L; MPN: RT0603BRD073K32L; POWER: 0.1W; RESISTANCE: 3.32k; TOLERANCE: 0.1%; VOLTAGE_CONTINUOUS: 18.22V; VOLTAGE_MAX: 75V
R46 = HyTechDevices; DKPN: P20904TR-ND; MANUFACTURER: Panasonic Electronic Components; MOPN: 667-ERJ-PB6B5233V; MPN: ERJ-PB6B5233V; POWER: 0.25W; RESISTANCE: 523k; TOLERANCE: 0.1%; VOLTAGE_CONTINUOUS: 150V; VOLTAGE_MAX: 150V
R48 = HyTechDevices; DKPN: RT0603BRE0775KL-ND; MANUFACTURER: Yageo; MOPN: 603-RT0603BRE0775KL; MPN: RT0603BRE0775KL; POWER: 0.1W; RESISTANCE: 75k; TOLERANCE: 0.1%; VOLTAGE_CONTINUOUS: 75V; VOLTAGE_MAX: 75V
R49 R50 = HyTechDevices; DKPN: P20144TR-ND; MANUFACTURER: Panasonic Electronic Components; MOPN: 667-ERJ-PB3B3322V; MPN: ERJ-PB3B3322V; POWER: 0.1W; RESISTANCE: 33.2k; TOLERANCE: 0.1%; VOLTAGE_CONTINUOUS: 57.6V; VOLTAGE_MAX: 75V
R51 = HyTechDevices; DKPN: P154KDBCT-ND; MANUFACTURER: Panasonic Electronic Components; MOPN: 667-ERA-3AEB1543V; MPN: ERA-3AEB1543V; POWER: 0.1W; RESISTANCE: 154k; TOLERANCE: 0.1%; VOLTAGE_CONTINUOUS: 75V; VOLTAGE_MAX: 75V
TP1-TP16 TP18-TP20 = HyTechDevices; DKPN: 36-5015CT-ND; MANUFACTURER: Keystone Electronics; MOPN: 534-5015; MPN: 5015
U1 = HyTechDevices; DKPN: 505-LTC6994CS6-1#TRMPBFTR-ND; MANUFACTURER: Analog Electronics; MOPN: 584-C6994CS6-1TRMPBF; MPN: LTC6994CS6-1#TRMPBF
U2 = HyTechDevices; DKPN: 497-17240-1-ND; MANUFACTURER: STMicroelectronics; MOPN: 511-LDL1117S50R; MPN: LDL1117S50R
U10 = HyTechDevicesTempTSB; DKPN: 1102-DCM4623TD2J13D0T70-ND; MANUFACTURER: Vicor; MOPN: 492-DCM4623D2J13D0T7; MPN: DCM4623TD2J13D0T70
U11 = HyTechDevicesTempTSB; DKPN: 255-2897-ND; MANUFACTURER: Panasonic Industrial Devices; MOPN: 769-AQY414EHA; MPN: AQY414EHA
U15 = HyTechDevices; DKPN: 2156-SN74LVC1G04DCKR-ND; MANUFACTURER: Texas Instruments; MOPN: 595-SN74LVC1G04DCKR; MPN: SN74LVC1G04DCKR
U16 = HyTechDevices; DKPN: LTC3639EMSE#TRPBFTR-ND; MANUFACTURER: Analog Devices Inc.; MOPN: 584-LTC3639EMSETRPBF; MPN: LTC3639EMSE#TRPBF
U17 = HyTechDevices; DKPN: LR8K4-GTR-ND; MANUFACTURER: Microchip Technology; MOPN: 689-LR8K4-G; MPN: LR8K4-G
U18 U19 = HyTechDevices; DKPN: 296-52316-1-ND; MANUFACTURER: Texas Instruments; MOPN: 595-ISO224BDWVR; MPN: ISO224BDWVR
U$1 = HyTechDevices; DKPN: 255-1436-5-ND; MANUFACTURER: AQY214EHA; MOPN: 769-AQY214EHA; MPN: AQY214EHA
U$5-U$15 U$26 U$34 U$35 U$37-U$39 U$41 = HyTechDevices
U$31 = HyTechDevices; MANUFACTURER: Molex; MPN: 2165713006
U$33 = HyTechDevices; MANUFACTURER: Molex; MPN: 2165713007
U$43 U$46 U$47 U$53 U$56-U$77 = HyTechManufacturing
U$44 U$45 U$48 U$52 U$54 U$55 = HyTechAesthetics
XF1 = HyTechDevices; DKPN: 36-3568-ND; MANUFACTURER: Keystone; MOPN: 534-3568; MPN: 3568

## Nets
+5V: C5.1 C7.1 C9.1 C10.1 C41.1 C42.1 C43.1 C44.1 R44.2 R53.1 TP2.1 U1.5 U2.2 U2.4 U15.5 U18.8 U19.8
+12V: C6.1 C8.1 J3.1 R35.2 TP1.1 U2.3
DCDC+: J5.1 J5.3 R30.2 TP9.1 XF1.3 XF1.4
DCDC-: C26.- C27.1 C28.1 C29.1 D5.1 J5.2 J5.4 TP10.1 U10.7 U10.9
ENABLE: U10.3 U11.4
GND: C5.2 C6.2 C7.2 C8.2 C9.2 C10.2 C11.2 C41.2 C42.2 C43.2 C44.2 D1.1 D2.1 D3.1 D4.1 D7.A D9.1 D11.1 D12.1 J3.4 K4.3 Q2.2 R38.1 R46.1 R51.1 TP3.1 U1.2 U2.1 U11.2 U15.3 U18.5 U19.5 U$1.2
IP+: J3.5 TP5.1 U19.7
IP-: J3.6 TP6.1 U19.6
IT+: J3.7 TP7.1 U18.7
IT-: J3.8 TP8.1 U18.6
LED+: R63.2 U$31.3
N$1: R10.1 R11.2
N$2: R3.2 R4.1 U16.12
N$3: Q2.1 R37.2
N$4: R44.1 R46.2 U1.6
N$5: R4.2 R5.1 U16.14
N$6: R34.2 U11.1
N$7: R1.1 R2.2
N$8: R43.2 R45.1 U17.3
N$13: R8.2 R9.2 R11.1 R49.1
N$14: C11.1 R51.2 U1.3
N$15: C2.1 C30.1 D14.C R26.2 U17.1
N$16: R28.2 R34.1 U1.4
N$17: D2.2 R28.1
N$18: D5.2 R30.1
N$22: D3.2 R29.1
N$23: R2.1 R6.2 R7.2 R50.1
N$24: D4.2 R52.1
N$25: D9.2 R35.1
N$29: L4.2 R31.1
N$30: D11.2 R53.2
N$31: D12.2 R54.1
N$35: D13.2 R55.1
N$39: C1.1 C24.1 C25.1 L4.1 L5.1 U10.1
N$40: D8.A K5.3 Q2.3
N$43: D6.2 R32.2
N$44: R32.1 U10.4
N$45: R33.1 U10.2
N$46: C26.+ C27.2 C28.2 C29.2 U10.6 U10.8 XF1.1 XF1.2
N$50: K5.4 R19.1
N$51: K4.4 R18.2
N$52: D1.3 R37.1 R38.2 R52.2 U15.4
N$53: R36.1 U$1.1
N$57: R27.2 U$1.3
N$58: C3.1 C31.1 D10.A D14.A R45.2 R47.1 U17.2
N$60: C35.2 R47.2
N$61: C4.1 C32.1 C33.1 C35.1 D10.C R5.2 U16.3
N$62: C48.1 R49.2 U19.2
N$63: C49.1 R50.2 U18.2
N$64: R48.2 U16.11
N$65: L6.1 U16.1
N$69: C45.1 U19.1
N$73: C38.1 U18.1
N$76: U16.7 U16.10
PACK+: K5.1 TP12.1 U$1.4 U$33.5
PACK+FUSED: R10.2 R27.1 TP13.1
PRECHARGE_OK: J3.3 R29.2 TP4.1 U1.1 U15.2
SHDN: D7.C D8.C J3.2 K4.2 K5.2 R36.2 R54.2 TP11.1
TS+5V: C34.1 C36.1 C37.1 C39.1 C40.1 C46.1 C47.1 L6.2 R55.2 R63.1 TP20.1 U16.9 U18.3 U19.3
TS+FUSED: F6.2 L5.2 R1.2 R26.1 R31.2 U$33.4
TS+UNFUSED: F6.1 K4.1 R16.1 R19.2 TP14.1 U$33.1 U$33.2
TS-FUSED: C1.2 C2.2 C3.2 C4.2 C24.2 C25.2 C30.2 C31.2 C32.2 C33.2 C34.2 C36.2 C37.2 C38.2 C39.2 C40.2 C45.2 C46.2 C47.2 C48.2 C49.2 D6.1 D13.1 F2.2 R3.1 R6.1 R7.1 R8.1 R9.1 R33.2 R43.1 R48.1 TP16.1 U10.5 U11.3 U16.6 U16.8 U16.16 U18.4 U19.4 U$31.1 U$31.2
TS-UNFUSED: F2.1 R17.1 R18.1 TP15.1 U$31.5
TSMP+: R16.2 TP18.1 U$33.3
TSMP-: R17.2 TP19.1 U$31.4

## Tracks (layer width: path | path; a pad name or v marks a point on that pad's centre or on a via)
+5V  (via drill 0.38)
  Top 0.254: U15.5 65.96,11.26 66.42,11.73 U2.2 66.42,11.6 | U2.4 66.42,11.6 | 66.42,11.6 66.93,11.09 69.45,11.09 v70.59,12.23 73.26,12.23 C10.1 74.09,13.06 78.04,13.06 78.69,12.41 78.79,12.41 78.8,12.4 v84.34,12.4 | U15.5 59.41,11.98 v59.41,12.15 | R53.1 31.64,10.72 v32,11.09 30.73,12.36 17.91,12.36 TP2.1 | v57.91,9.22 58.69,10 U15.5 | v99.19,13.76 98.06,13.76 U18.8 | v91.92,13.76 91.89,13.76 91.88,13.75 90.88,13.75 90.89,13.77 U19.8
  Route15 0.254: v57.91,9.22 57.47,9.67 49.11,9.67 47.78,10.99 32.1,10.99 v32,11.09
  Bottom 0.254: U1.5 73.37,10.97 R44.2 70.75,12.07 v70.59,12.23 70.59,10.95 69.96,10.32 68.33,10.32 67.58,11.07 C7.1 67.51,11.16 C9.1 | v59.41,12.15 59.41,12 59.03,11.61 C5.1 | v99.19,13.76 97.27,13.76 C41.1 97.14,13.38 C42.1 95.08,9.92 88.26,9.92 | v91.92,13.76 91.89,13.73 89.75,13.73 C43.1 C44.1 89.65,11.31 88.26,9.92 | v84.34,12.4 86.81,9.92 88.26,9.92
+12V  (via drill 0.38, 0.76)
  Top 0.254: R35.2 29.76,10.46 v30.48,10.46 29.23,11.7 13.74,11.7 TP1.1 | v42.24,6.86 45.01,9.63 J3.1
  Top 0.508: v62.18,12.18 62.89,12.89 U2.3
  Route15 0.254: v30.48,10.46 34.45,6.48 41.86,6.48 v42.24,6.86
  Route15 0.508: v61.72,8.93 61.01,8.22 46.99,8.22 46.74,8.22 46.72,8.22 J3.1
  Bottom 0.254: C6.1 64.59,12.57 C8.1 63.3,11.06 v62.18,12.18
  Bottom 0.508: v61.72,8.93 61.72,11.72 v62.18,12.18
DCDC+
  Top 0.254: TP9.1 99.78,131.12 R30.2
  pour Route15: 90.04,139.36 90.04,135.55 115.06,135.55 115.06,123.74 96.65,123.74 96.65,125.39 85.34,125.39 85.34,131.49 81.41,131.49 81.41,139.36
  pour Top: 81.41,139.36 90.04,139.36 90.04,135.55 115.06,135.55 115.06,123.74 96.65,123.74 96.65,125.39 85.34,125.39 85.34,131.49 81.41,131.49
DCDC-  (via drill 0.38)
  Top 0.254: TP10.1 99.5,126.39 D5.1 104.71,126.39 103.07,124.76 v97.79,124.76
  Bottom 0.508: C28.1 72.96,140.02 C26.-
  Bottom 0.762: C27.1 70.37,138.48 C28.1 C29.1
  pour Bottom (no thermals): 54.48,135.93 58.17,139.61 58.17,146.22 59.56,147.62 88.52,147.62 90.04,146.09 90.04,135.55 115.06,135.55 115.06,123.74 96.65,123.74 96.65,125.39 54.48,125.39
  pour Route2 (no thermals): 54.48,135.93 58.17,139.61 58.17,146.22 59.56,147.62 88.52,147.62 90.04,146.09 90.04,135.55 115.06,135.55 115.06,123.74 96.65,123.74 96.65,125.39 54.48,125.39
ENABLE  (via drill 0.76)
  Top 0.254: 83.82,60.11 83.82,67.73 81.03,70.53 76.2,70.53 73.11,73.62 U10.3
  Top 0.508: v81.91,28.36 80.39,29.89 80.39,56.68 83.82,60.11
  Bottom 0.508: v81.91,28.36 81.16,27.61 U11.4
GND  (via drill 0.38, 1.14)
  Top 0.254: Q2.2 55.15,14.95 R38.1 56.37,14.48 U15.3 57.39,12.9 v56.87,12.39 | D11.1 31.64,5.44 D9.1 26.77,5.44 D3.1 D4.1 D2.1 19.84,5.37 D12.1 18.04,5.24 v17.78,5.5 | D1.1 53.92,5.49 v53.85,5.41 | TP3.1 9.78,7.66 v9.14,7.03 | v93.22,13.63 93.36,13.78 U18.5 | U2.1 68.72,13.26 69.41,13.95 v71.72,13.95 73.33,13.95 C10.2 | U19.5 86.61,14.28 v86.06,14.28
  Top 0.508: U$1.2 191.52,7.66 v191.13,7.28
  Top 0.762: Q2.2 54.74,15.85 v54.74,17.19
  Bottom 0.254: C8.2 66.09,12.57 C6.2 66.98,13.5 68.83,13.5 69.01,13.33 C9.2 | C7.2 69.01,11.16 C9.2 | v71.72,13.95 70.36,13.95 C9.2 | C5.2 57.44,12.39 v56.87,12.39 | U11.2 81.1,13.95 v78.94,13.95 | U1.2 78.31,10.97 78.31,10.96 79.53,10.96 v79.91,11.34 | C42.2 95.64,13.38 C41.2 95.39,13.63 v93.22,13.63 | v87.57,10.72 88.15,11.3 C44.2 C43.2 87.5,14.28 v86.06,14.28 | C11.2 78.61,8.04 | 78.61,8.04 v78.61,6.77 78.61,5.42 R51.1 | R46.1 78.35,8.31 78.61,8.04
  Bottom 0.762: K4.3 129.09,20.8 D7.A
  pour Route2 (no thermals): 0,5.5 0,14.39 16.64,14.39 26.8,24.55 54.18,24.55 54.18,24.55 54.29,24.55 54.29,24.53 64.26,14.55 78.94,14.55 79.63,15.25 99.23,15.25 102.38,12.11 115.44,12.11 125.35,22.01 153.29,22.01 165.1,10.2 192.15,10.2 192.15,4.11 1.4,4.11
IP+  (via drill 0.38)
  Top 0.254: U19.7 89.66,12.87 88.24,11.45 86.59,11.45 v85.65,12.38 | TP5.1 40.7,16.81 45.01,12.49 J3.5
  Route15 0.254: v85.65,12.38 84.74,11.47 82.42,11.47 81.52,10.57 49.54,10.57 48.26,11.85 45.63,11.85 J3.5
IP-  (via drill 0.38)
  Top 0.254: TP6.1 33.53,15.15 39.79,15.15 J3.6 | v86.94,12.18 87.25,11.87 88.05,11.87 88.39,12.2 U19.6
  Route15 0.254: v86.94,12.18 85.81,11.05 82.68,11.05 81.74,10.12 49.36,10.12 48.08,11.4 43.54,11.4 J3.6
IT+  (via drill 0.38)
  Top 0.254: v93.73,11.09 95.01,11.09 96.77,12.85 U18.7 | TP7.1 29.21,14.39 38.03,14.39 39.93,12.49 J3.7
  Route15 0.254: v93.73,11.09 93.6,10.96 92.2,10.96 90.03,13.13 80.36,13.13 79.67,12.45 78.44,12.45 77.85,13.04 72.77,13.04 72.22,12.49 71.35,12.49 70.73,13.11 50.05,13.11 49.59,13.57 41.01,13.57 J3.7
IT-  (via drill 0.38)
  Top 0.254: v92.46,11.85 95.12,11.85 95.5,12.23 U18.6 | TP8.1 25.15,13.5 36.38,13.5 37.39,12.49 J3.8
  Route15 0.254: v92.46,11.85 91.93,11.85 90.23,13.55 80.2,13.55 79.5,12.85 78.61,12.85 78.02,13.44 72.6,13.44 72.11,12.95 71.47,12.95 70.9,13.52 50.43,13.52 49.94,14.01 38.92,14.01 38.92,14 J3.8
LED+  (via drill 0.76)
  Top 0.508: v109.09,58.33 108.62,58.8 108.62,59.86
  Top 0.762: 108.62,59.86 R63.2
  Route15 0.508: U$31.3 196.56,56.81 110.62,56.81 v109.09,58.33
N$1
  Top 0.254: R11.2 R10.1
N$2  (via drill 0.38)
  Top 0.254: U16.12 101.86,64.43 v101.6,64.18
  Bottom 0.254: R3.2 R4.1 101.89,64.47 v101.6,64.18
N$3
  Top 0.254: R37.2 53.83,11.4 Q2.1
N$4
  Bottom 0.254: R44.1 74.09,9.97 U1.6 74.14,8.5 R46.2
N$5  (via drill 0.38)
  Top 0.254: v100.33,63.8 100.33,64.05 101.71,65.43 U16.14
  Bottom 0.254: R4.2 104.05,66.08 R5.1 102.36,66.08 100.33,64.05 v100.33,63.8
N$6
  Bottom 0.254: R34.2 77.94,13.76 79.59,12.11 81.79,12.11 83.68,14 U11.1
N$7
  Top 0.254: R2.2 R1.1
N$8
  Bottom 0.254: R43.2 R45.1 104.1,87.37 U17.3
N$13
  Top 0.254: R11.1 85.64,43.86 R9.2 R8.2 85.6,40.52 R49.1
N$14
  Bottom 0.254: R51.2 80.16,8.26 C11.1 76.97,9.81 U1.3
N$15  (via drill 0.35)
  Top 0.254: v112.52,92.5 112.52,91.86 112.52,91.37 C2.1 111.36,88.43 C30.1 113.41,90.3 R26.2
  Bottom 0.254: v112.52,92.5 112.52,91.34 109.1,87.93 108.15,87.93 U17.1 107.93,88.87 D14.C
N$16  (via drill 0.38)
  Top 0.254: R28.2 22.88,9.97 v23.11,10.2 | v69.98,4.99 75.44,10.46 v75.44,12.29
  Route15 0.254: v23.11,10.2 28.68,4.64 69.62,4.64 v69.98,4.99
  Bottom 0.254: R34.1 74.08,11.98 U1.4 75.07,11.92 v75.44,12.29
N$17
  Top 0.254: R28.1 21.94,7.04 D2.2
N$18
  Top 0.254: R30.1 D5.2
N$22
  Top 0.254: R29.1 26.68,7.04 D3.2
N$23
  Top 0.254: R50.1 97.41,40.39 R7.2 R6.2 97.75,42.08 R2.1
N$24
  Top 0.254: R52.1 24.31,7.04 D4.2
N$25
  Top 0.254: R35.1 D9.2
N$29
  Top 0.254: R31.1 96.46,79.92
  Top 0.508: 96.46,79.92 L4.2
N$30
  Top 0.254: R53.2 31.64,7.09 D11.2
N$31
  Top 0.254: R54.1 19.7,6.91 D12.2
N$35
  Top 0.254: R55.1 111.66,65.23 D13.2
N$39
  Top 0.254: 97.18,87.06 L4.1
  Top 0.508: 86.56,81.32 U10.1 81.15,79.97 C25.1 | 87.74,75.6 L5.1 87.74,83.34 88.6,84.19 94.31,84.19 95.44,85.32 95.63,85.51 97.18,87.06
  Top 1.016: 86.56,81.32 L5.1 | 87.74,75.6 C24.1 C1.1
N$40
  Top 0.762: Q2.3 45.1,20.74 29.21,20.74 27.78,22.17 K5.3
  Bottom 0.762: K5.3 28.31,23.03 D8.A
N$43
  Top 0.254: D6.2 R32.2
N$44
  Top 0.254: R32.1 71.86,79.82 U10.4
N$45
  Bottom 0.254: R33.1 72.84,78.29 U10.2
N$46
  Bottom 0.508: C26.+ 68.59,140.3 C28.2
  Bottom 0.762: C29.2 C28.2 68.87,138.48 C27.2
  pour Top (no thermals): 54.48,125.39 54.48,135.93 58.17,139.61 58.17,146.22 59.56,147.62 88.52,147.62 90.04,146.09 90.04,140.12 80.64,140.12 80.64,130.85 84.58,130.85 84.58,125.39
  pour Route15 (no thermals): 58.17,139.61 58.17,146.22 59.56,147.62 88.52,147.62 90.04,146.09 90.04,140.12 80.64,140.12 80.64,130.85 84.58,130.85 84.58,125.39 54.48,125.39 54.48,135.93
N$50
  Route2 0.508: K5.4 19.05,37.69 R19.1
N$51
  Bottom 0.762: R18.2 125.73,37.25 114.36,25.88 K4.4
N$52  (via drill 0.38)
  Top 0.254: R37.1 55.71,10.28 D1.3 53.58,9.43 52.45,8.3 52.45,6.56 v51.31,5.41 | R37.1 55.71,12.69 R38.2 | R37.1 55.76,11.26 U15.4 | R52.2 25.16,9.96 v25.53,10.33
  Route15 0.254: v25.53,10.33 30.44,5.41 v51.31,5.41
N$53
  Top 0.508: R36.1 187.79,8.17 U$1.1
N$57
  Top 0.508: U$1.3 188.98,21.8 R27.2
N$58  (via drill 0.38)
  Top 0.254: D10.A 101.3,78.23 R47.1 102.4,78.91 C31.1 103.4,81.18 | 103.4,81.18 103.4,81.95 C3.1 | v101.6,82.97 103.4,81.18
  Bottom 0.254: D14.A 109.19,95.37 U17.2 104.6,95.37 100.33,91.1 100.33,86.66 101.35,85.64 R45.2 101.6,84.84 v101.6,82.97
N$60
  Top 0.254: C35.2 R47.2
N$61  (via drill 0.35)
  Top 0.254: U16.3 100.57,65.43 101.88,66.74 C4.1 103.4,70.14 103.4,72.14 | D10.C 100.08,74.34 100.83,73.59 C35.1 102.75,73.59 C32.1 103.4,72.81 103.4,72.14 | v102.11,70.85 103.4,72.14
  Bottom 0.254: R5.2 100.42,67.19 103.4,70.16 C32.1 103.4,72.14 v102.11,70.85
N$62
  Top 0.254: R49.2 87.4,37.42 C48.1 89.66,35.36 U19.2
N$63
  Top 0.254: R50.2 95.86,37.29 C49.1 96.77,36.38 U18.2
N$64  (via drill 0.38)
  Top 0.254: U16.11 103,63.87 102.31,63.87 v101.23,62.78 v101.22,62.78
  Bottom 0.254: R48.2 101.18,62.74 v101.22,62.78
N$65
  Top 0.254: L6.1 93.3,66.43 U16.1
N$69
  Top 0.254: C45.1 U19.1
N$73
  Top 0.254: U18.1 C38.1
N$76  (via drill 0.38)
  Top 0.254: U16.7 99.42,63.43 99.95,62.91 v99.95,62.5 | v102.33,61.73 102.23,61.82 102.23,63.16 102.51,63.43 U16.10
  Route15 0.254: v99.95,62.5 100.72,61.73 v102.33,61.73
PACK+  (via drill 0.38, 1.14)
  Top 0.254: v168.53,32.73 157.48,43.78 157.48,75.02 134.24,98.26 v134.24,98.34 | v115.7,103.29 112.61,103.29 TP12.1
  Top 0.508: U$1.4 196.73,22.87 U$33.5
  Route2 0.254: v134.24,98.34 132.82,99.76 119.23,99.76 v115.7,103.29
  Route2 0.762: U$33.5 188.8,32.73 v168.53,32.73 162.23,39.03 119.51,39.03 112.99,32.52 74.84,32.52 K5.1
PACK+FUSED  (via drill 0.38, 0.76)
  Top 0.254: v102.87,50.59 102.87,54.52 v105.79,57.45 | 111.11,95.8 TP13.1 | v85.72,50.59 85.72,49.02 R10.2 | v110.24,95.8 111.11,95.8 | 111.11,95.8
  Top 0.508: R27.1 188.72,28.36 v188.34,28.74 | v103.89,30.27 103.89,49.57 v102.87,50.59
  Route2 0.254: v105.79,57.45 109.22,60.87 109.22,94.78 v110.24,95.8
  Route2 0.508: v102.87,50.59 v85.72,50.59 | v188.34,28.74 167.13,28.74 160.15,35.73 120.27,35.73 114.81,30.27 v103.89,30.27
PRECHARGE_OK  (via drill 0.38)
  Top 0.254: v60.7,12.38 60.7,13.64 59.56,14.77 58.67,14.77 58.04,14.14 U15.2 | v27.69,10.96 v27.68,10.96 R29.2 26.68,10.57 26.03,11.22 9.4,11.22 TP4.1
  Route15 0.254: v78.49,11.69 77.86,11.07 61.11,11.07 60.7,11.48 v60.7,12.38 | v27.69,10.96 27.9,11.18 30.89,11.18 31.83,10.24 31.84,10.24 35.05,7.03 38.1,7.03 39.88,8.8 39.93,8.86 39.93,8.87 J3.3
  Bottom 0.254: v60.7,12.38 60.7,9.3 57.53,6.14 41.93,6.14 39.93,8.14 J3.3 | U1.1 78.25,11.92 v78.49,11.69
SHDN  (via drill 0.38)
  Top 0.254: v20.83,10.07 20.59,9.83 R54.2 15.38,9.83 TP11.1
  Top 0.508: K4.2 164.78,8.17 R36.2
  Route15 0.762: K4.2 136.35,4.99 77.85,4.99 76.22,6.62 44.44,6.62 42.47,8.59 J3.2
  Bottom 0.254: v20.83,10.07 22.73,11.98 32.38,11.98 33.24,11.12 41.31,11.12 42.47,9.95 J3.2
  Bottom 0.762: 52.83,23.21 52.83,12.36 47.29,6.82 44.24,6.82 42.47,8.59 J3.2 | 52.83,23.21 K5.2 | D8.C 52.65,23.03 52.83,23.21 | D7.C 151.97,20.62 K4.2
TS+5V  (via drill 0.38)
  Top 0.254: C37.1 C36.1 106.89,63.51 C34.1 104.46,62.93 U16.9 103.07,61.33 102.11,60.37 94.54,60.37 L6.2 91.82,57.64 91.82,34.33 v92.46,33.7 95.49,30.66 C40.1 C39.1 95.49,24.69 U18.3 | U19.3 88.39,26.57 C46.1 C47.1 88,30.6 v88.65,31.25 | C37.1 108.61,63.58 R55.2 | C37.1 R63.1 111.97,61.6 113.03,62.65 113.03,73.83 v112.01,74.84 | v99.19,102.78 100.2,103.8 106.17,103.8 106.51,103.46 TP20.1
  Route15 0.254: v112.01,74.84 99.06,87.8 99.06,102.66 v99.19,102.78
  Bottom 0.254: v92.46,33.7 90,31.25 v88.65,31.25
TS+FUSED  (via drill 0.76)
  Top 0.254: 120.08,88.75 120.08,89.32 116.67,89.32 R26.1 | R1.2 99.19,54.4 v98.3,55.29
  Top 0.508: 120.08,88.75 119.38,89.45 F6.2 | F6.2 120.08,89.34 120.08,89.32 | F6.2 120.84,90.32 | L5.2 95.27,78.06 R31.2 97.95,78.06 98.81,78.91
  Top 0.762: 120.84,90.32 120.84,95.36 v120.9,95.42
  Top 1.016: 98.81,78.91 v98.81,79.29
  Route2 0.508: U$33.4 203.2,33.41 203.2,72.05 198.5,76.75 156.84,76.75 136.91,96.69 122.17,96.69 v120.9,95.42
  Route2 1.372: v98.3,55.29 109.98,55.29 114.17,59.48 114.17,93.01 115.57,94.4 115.7,94.4 116.71,95.42 v120.9,95.42 | 114.17,94.53 109.22,99.48 | 105.41,99.48 98.81,92.88 v98.81,79.29
  Route2 1.524: 114.17,93.01 114.17,94.53 | 109.22,99.48 105.41,99.48
TS+UNFUSED  (via drill 0.76)
  Top 0.254: F6.1 132.38,91.35 132.38,97.65 TP14.1
  Top 0.508: v135.76,88.43 134.75,89.45 F6.1 | U$33.2 193.26,37.86 181.29,25.88 K4.1
  Route2 0.508: 154.3,69.89 154.3,69.38 143.51,58.59 117.09,58.59 111.63,53.13 82.55,53.13 72.39,63.29 R16.1 69.85,63.16 R19.2
  Route2 1.372: U$33.1 U$33.2 194.36,42.16 194.36,65.53 189.99,69.89 154.3,69.89 v135.76,88.43
TS-FUSED  (via drill 0.35, 0.38, 0.76)
  Top 0.254: C36.2 C37.2 109.77,65.05 D13.1 | C36.2 106.63,65.36 C34.2 | U16.16 103.95,66.43 C34.2 | v106.93,66.21 C36.2 | U16.6 98.18,63.93 97.92,63.67 97.92,63.16 98.14,62.93 U16.8 98.04,62.12 v98.04,62.02 | 119.51,76.12 F2.2 116.27,76.12 113.41,78.98 C30.2 113.41,81.34 v112.59,82.16 110.31,82.16 109.24,83.23 C3.2 107.95,83.5 107.95,85.51 105.81,87.65 C2.2 | U19.4 86.49,25.3 86.49,26.95 C46.2 C47.2 86.5,31.3 v86.74,31.54 | U18.4 94.12,24.79 94.12,26.71 C39.2 C40.2 93.85,28.22 C45.2 90.93,30.39 v91.69,31.16 | v112.01,99.99 111.89,99.86 TP16.1 | v90.55,42.33 90.55,41.19 88.38,39.02 C48.2 87.5,40.9 87.34,41.06 | v93.22,42.33 93.22,40.43 94.63,39.02 C49.2 95.67,39.06 R7.1 R6.1 | v98.04,31.16 C38.2 | C31.2 C32.2 | U10.5 66.49,78.97 D6.1 | R8.1 87.34,41.06 | 87.34,41.06 R9.1 | C34.2 105.03,68.47 C4.2 108.08,68.62 108.84,69.38 108.84,71.54 108.95,71.65 C32.2 | v106.55,73.57 107.19,72.94 C32.2
  Top 0.508: v122.81,69.51 119.51,72.81 119.51,76.12 | v76.2,73.96 77,73.16 C25.2 84.27,70.04 C24.2 C1.2
  Route15 0.254: v122.81,69.51 122.81,89.2 v112.01,99.99
  Route15 0.508: 110.24,69.51 v106.93,66.21 106.93,63.41 104.01,60.49 99.57,60.49 v98.04,62.02
  Route15 1.372: U$31.2 195.34,58.59 133.73,58.59 v122.81,69.51 110.24,69.51 87.88,69.51 83.44,73.96 v76.2,73.96 69.21,73.96 66.49,76.68 U10.5
  Bottom 0.254: R3.1 106.89,66.17 v106.93,66.21 | v98.04,62.02 98.72,62.02 R48.1 | 91.44,42.33 91.44,36.11 | 91.44,36.11 92.07,35.47 95.5,35.47 98.04,32.93 v98.04,31.16 v91.69,31.16 | v86.74,31.54 91.31,36.11 91.44,36.11 | R33.2 67.17,78.29 66.49,78.97 U10.5 | R43.1 111.34,82.16 v112.59,82.16 | C32.2 107.19,72.94 v106.55,73.57
  Bottom 0.508: U$31.1 U$31.2 | R48.1 99.48,60.02 95.38,55.92 95.38,42.88 94.83,42.33 v93.22,42.33 91.44,42.33 v90.55,42.33 | U11.3 83.7,28.49 v86.74,31.54
TS-UNFUSED  (via drill 0.38, 0.76)
  Top 0.254: TP15.1 122.9,99.63 126.9,95.63 v126.97,95.63
  Top 0.508: v138.68,75.73 130.96,75.73 F2.1
  Route15 0.254: v138.68,75.73 138.68,91.35 134.41,95.63 v126.97,95.63
  Route15 1.372: U$31.5 194.56,54.03 183.15,54.03 R18.1
  Bottom 0.508: R18.1 R17.1 163.45,75.73 v138.68,75.73
TSMP+  (via drill 0.76)
  Top 0.254: TP18.1 132.59,103.31 165.1,70.8 165.1,43.6 173.84,34.86 v179.07,34.86
  Route2 0.508: U$33.3 v179.07,34.86 172.32,34.86 165.86,41.32 118.24,41.32 112.42,35.5 78.59,35.5 75.44,38.65 36.07,38.65 26.67,48.05 26.67,58.84 22.22,63.29 R16.2
TSMP-  (via drill 0.38, 0.76)
  Top 0.254: v125.09,105.58 123.06,105.58 121.47,103.99 TP19.1
  Route15 0.508: U$31.4 196,55.59 130.37,55.59 v130.21,55.43
  Bottom 0.254: v125.09,105.58 130.17,100.5 130.17,55.43 v130.21,55.43 125.73,59.91 R17.2

## Text on the board
tPlace: DCDC+ | DCDC- | TS+5V | PACK+ | TSMP- | TSMP+ | TS-F | TS-U | TS+U | PACK+F | IT- | IT+ | IP- | PC_OK | 12V+ | 5V+ | HyTech Racing 2022 / TSB Rev2 / Designed by Cody Kaminsky | SHDN | PC_D | PC_N | PC_OK | 12V+ | GND | SHDN
tNames: IP- | 5V+